# Altium PCB TempBoard.PcbDoc
Units mm, origin at the board's own origin, x right, y up, seen from the top; angles counter-clockwise.
Board outline 127 x 127 mm, 4 copper layers (Top Layer, Ground Plane, 3.3V Plane, Bottom Layer), stack 2.029 mm thick; 156 components, 161 nets, 860 pads, 0 vias.
Unrouted connection lines stored in the file: 533.
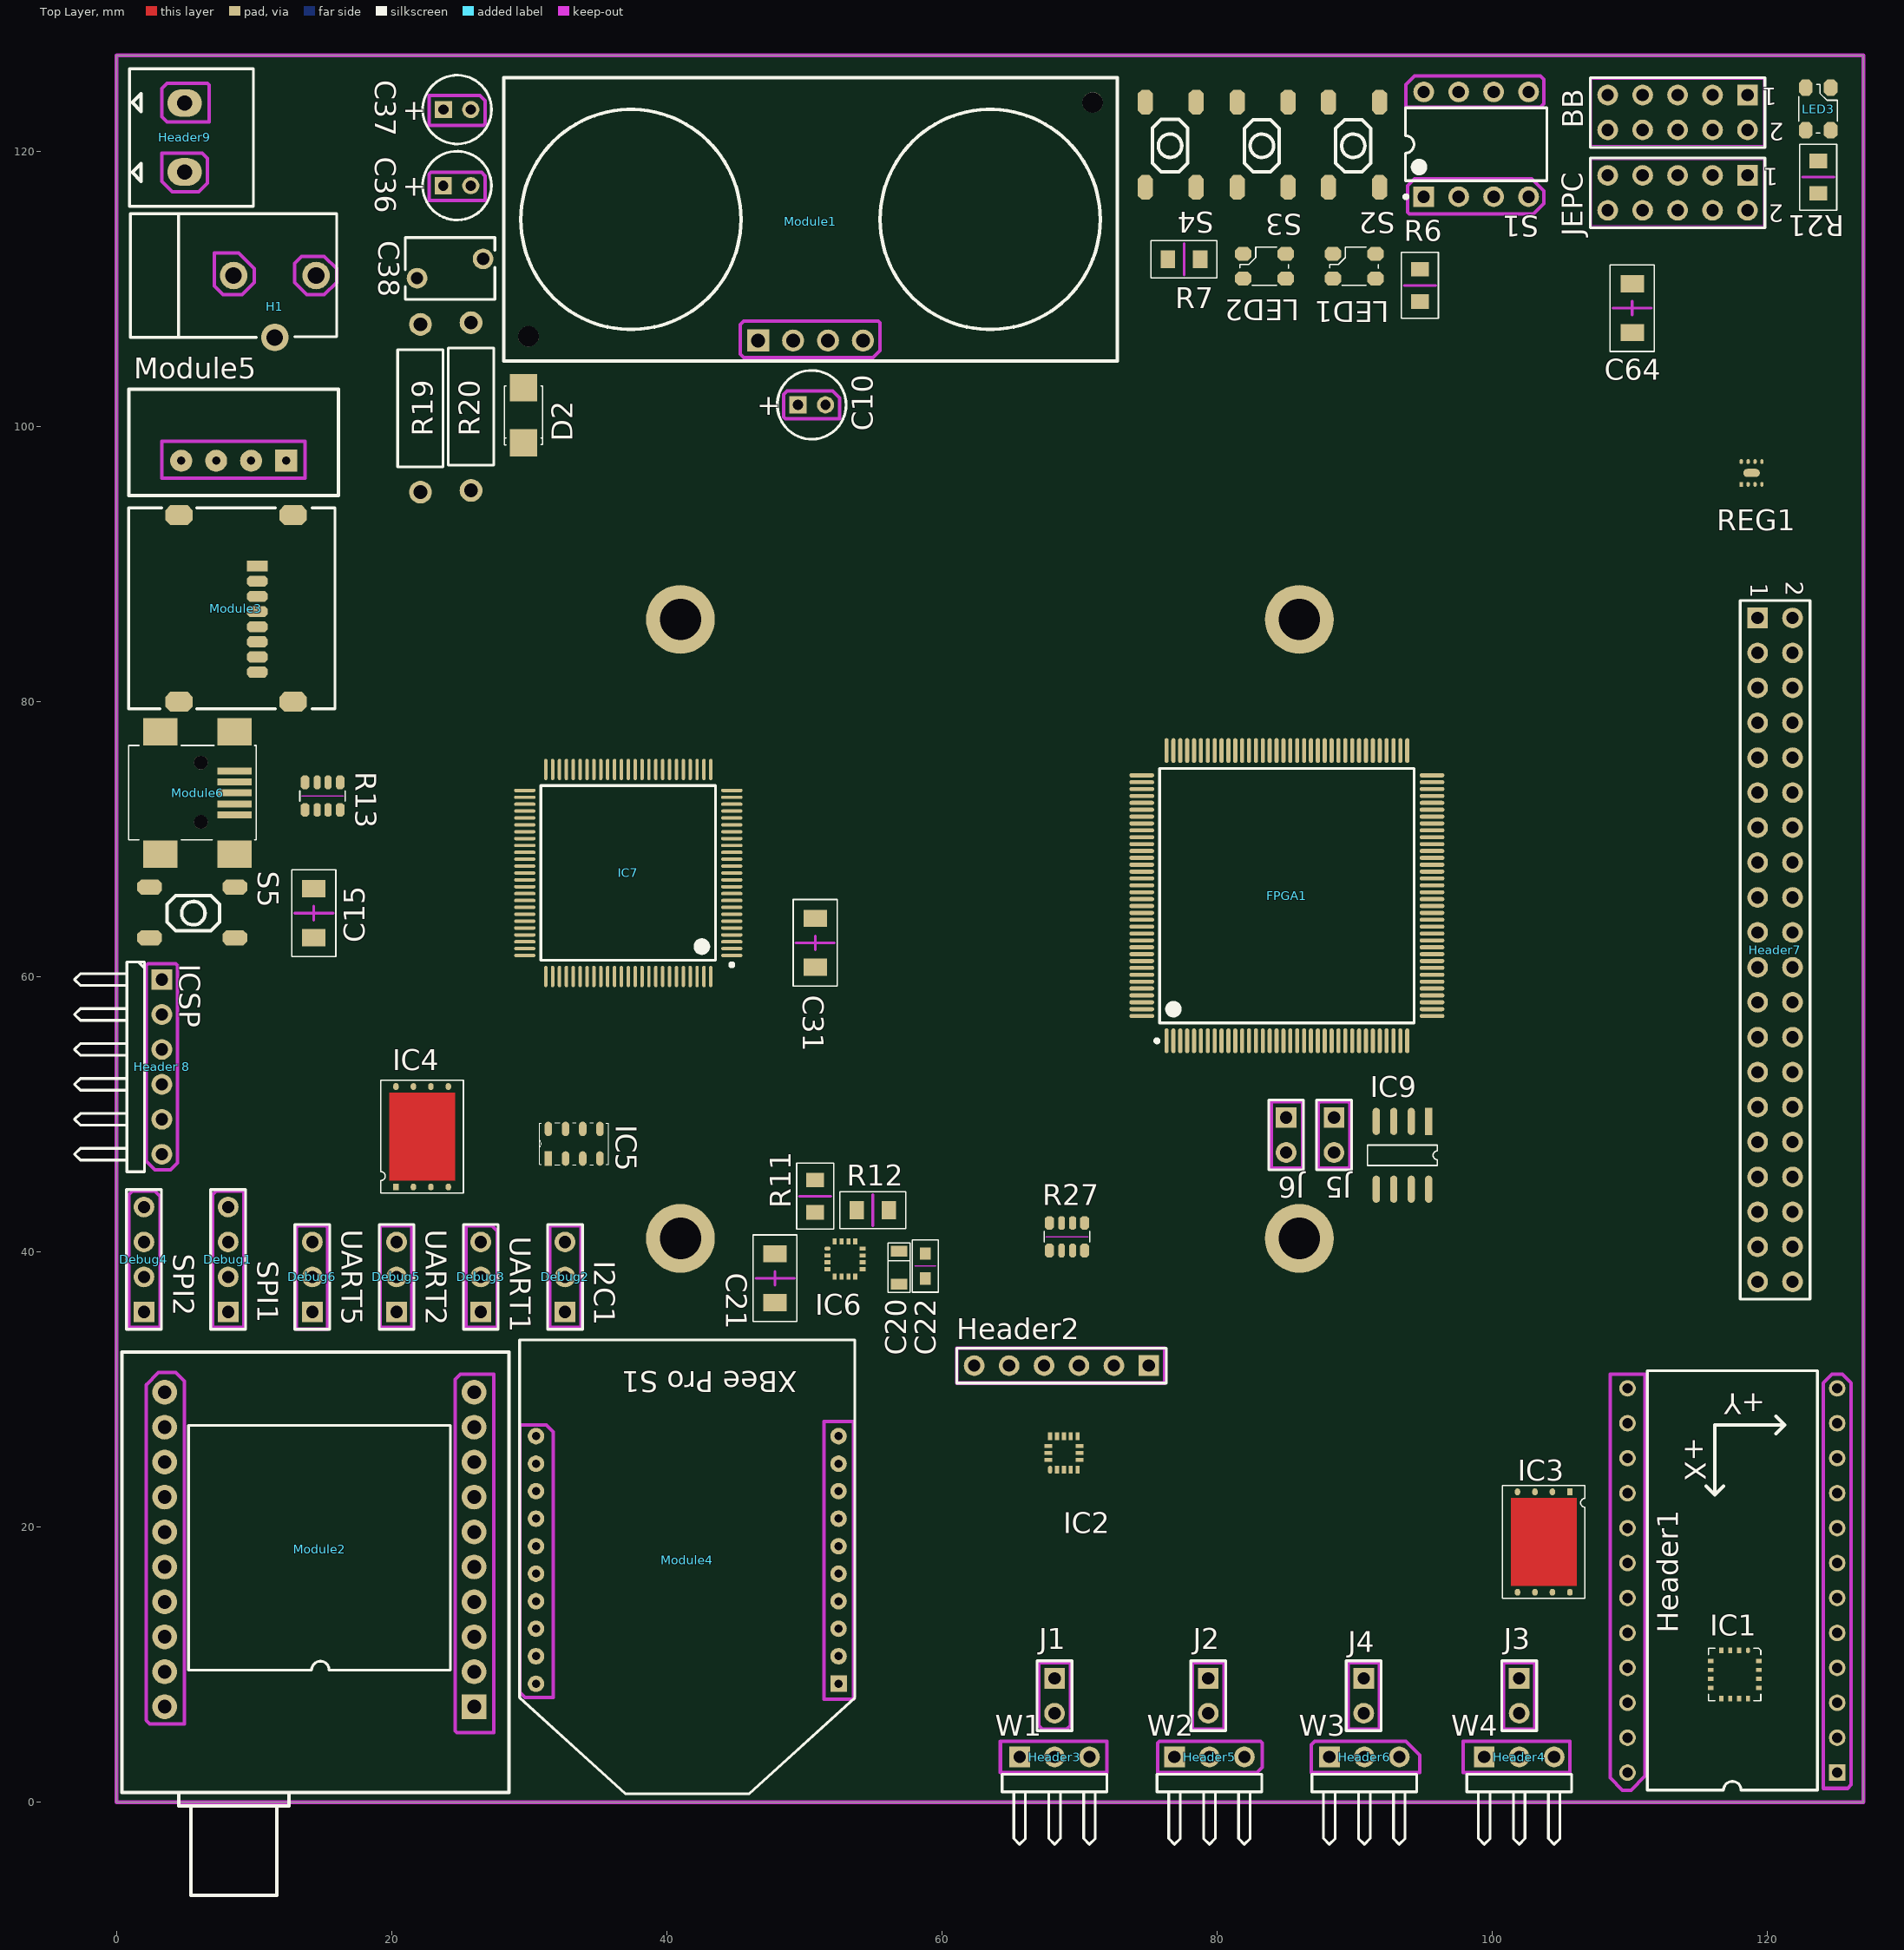
[diagram p0: Top Layer view]
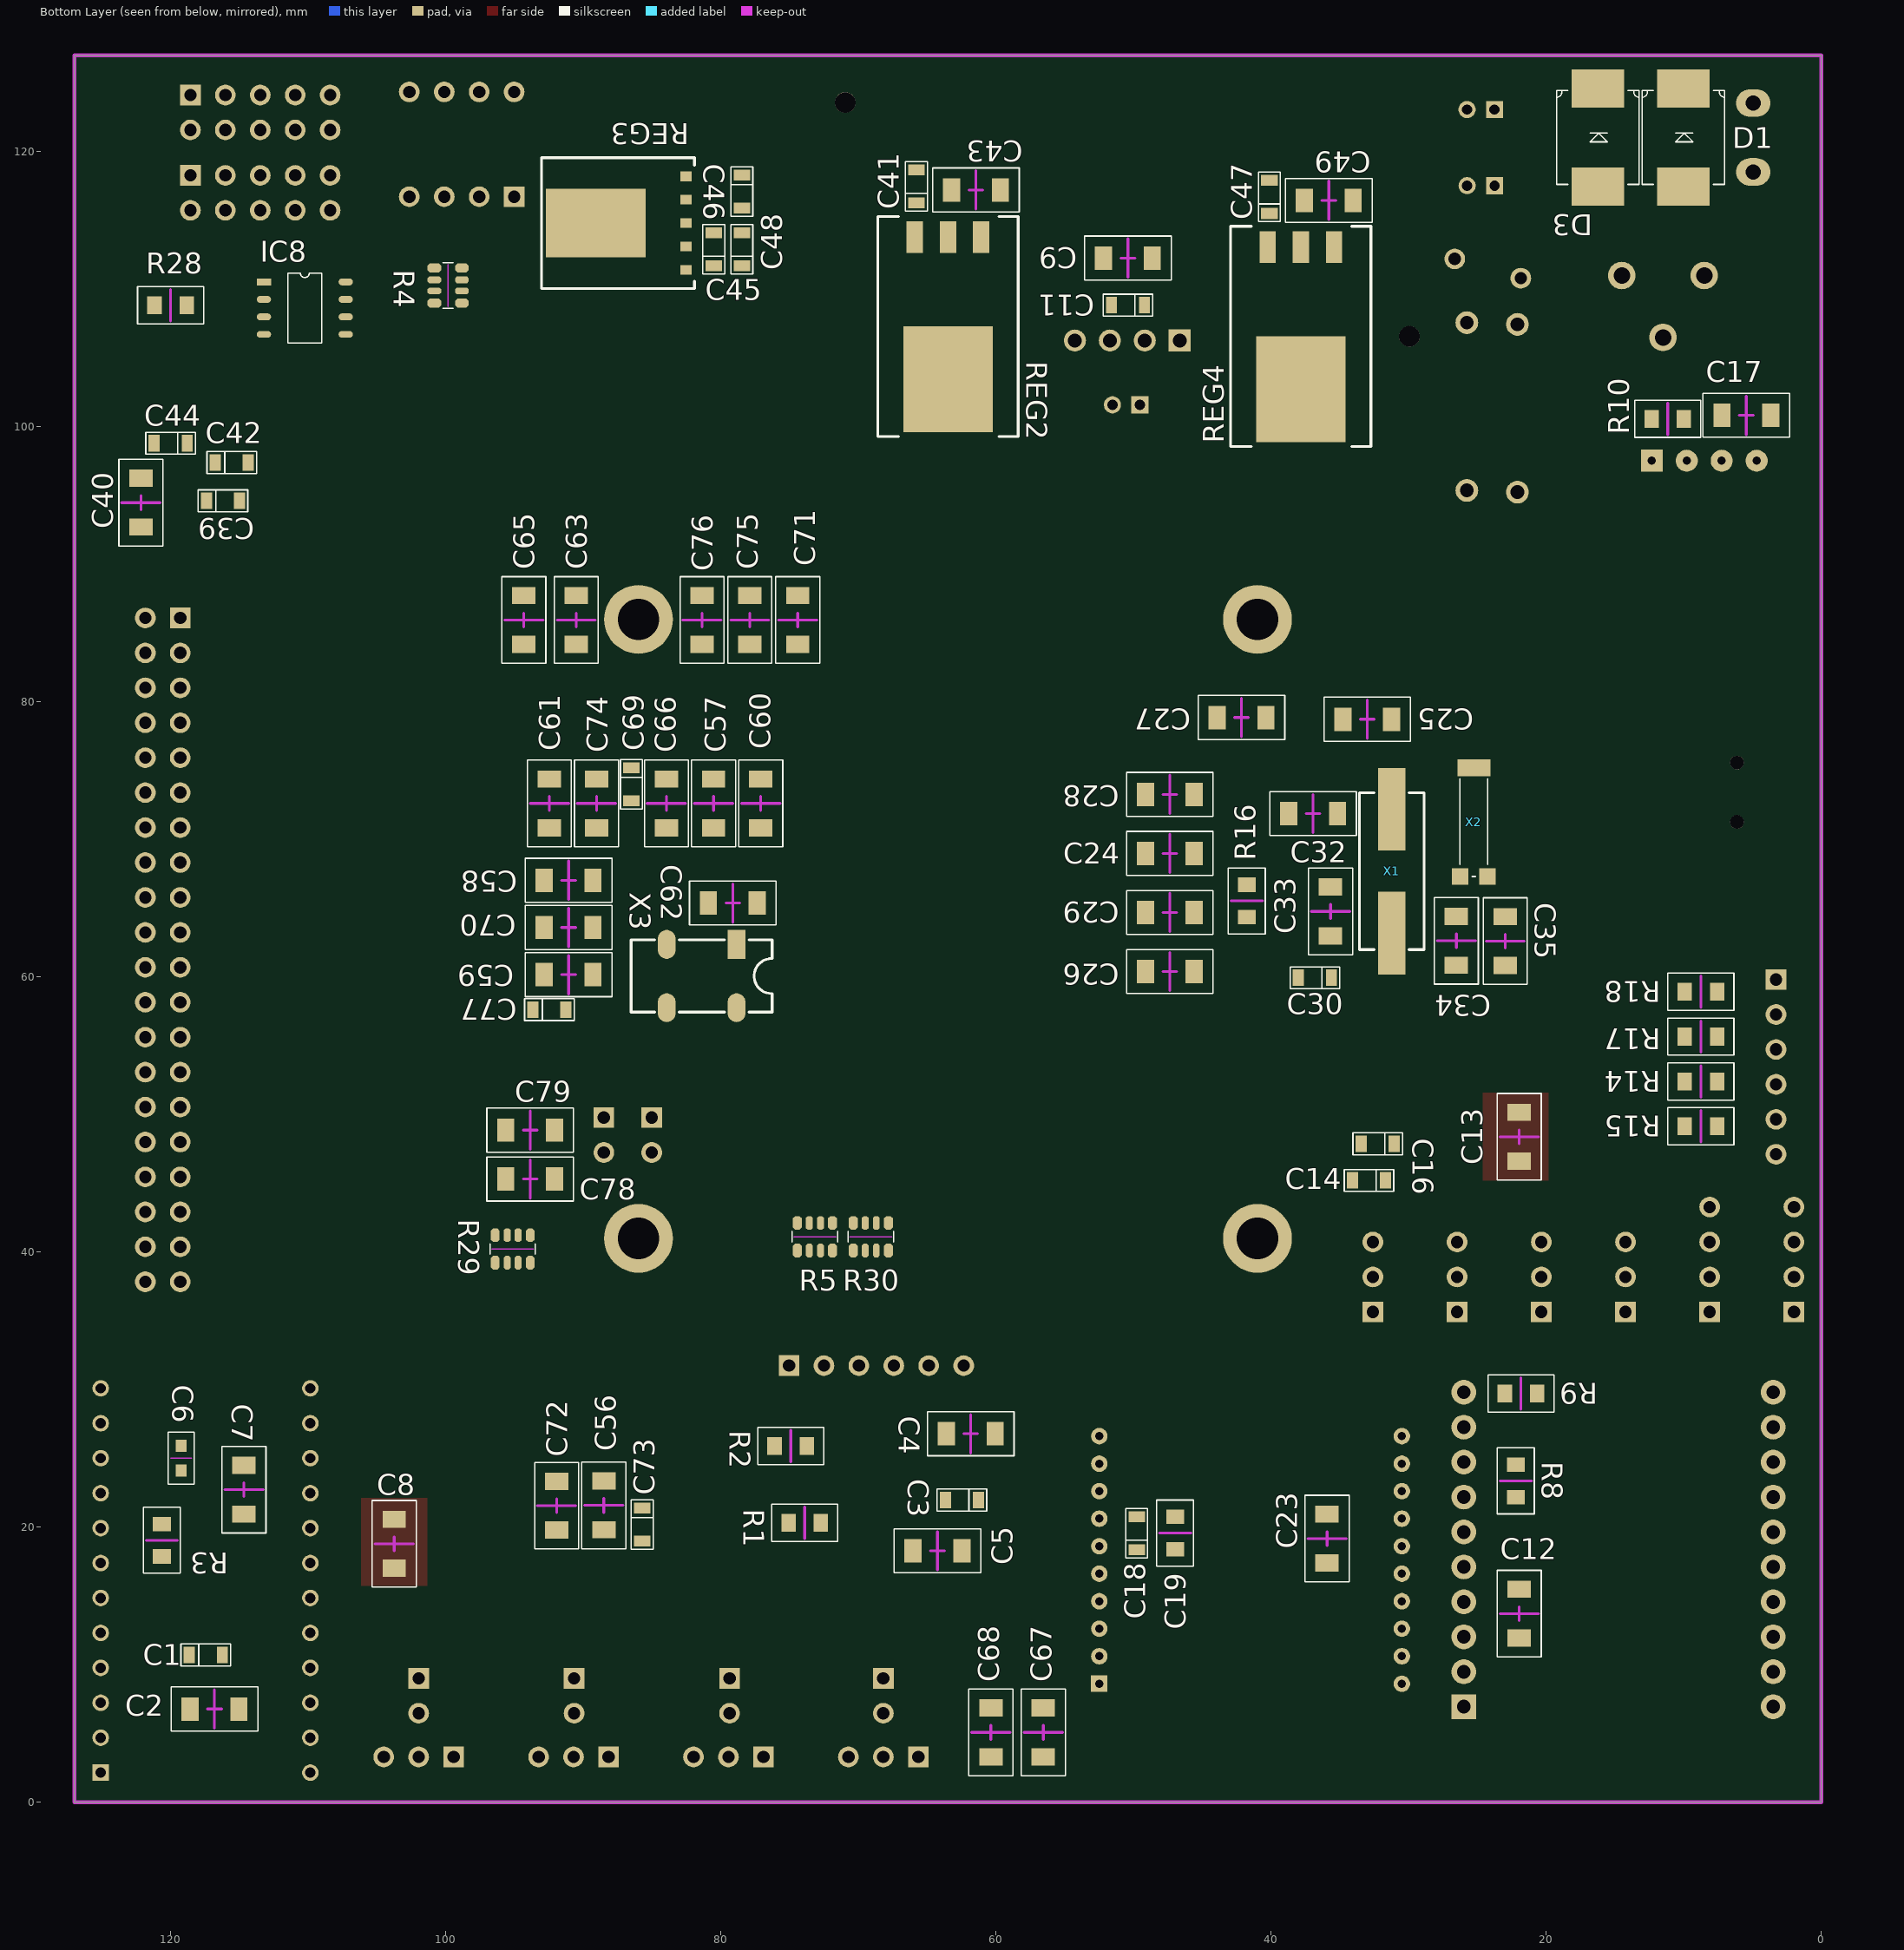
[diagram p1: Bottom Layer view, seen from below]
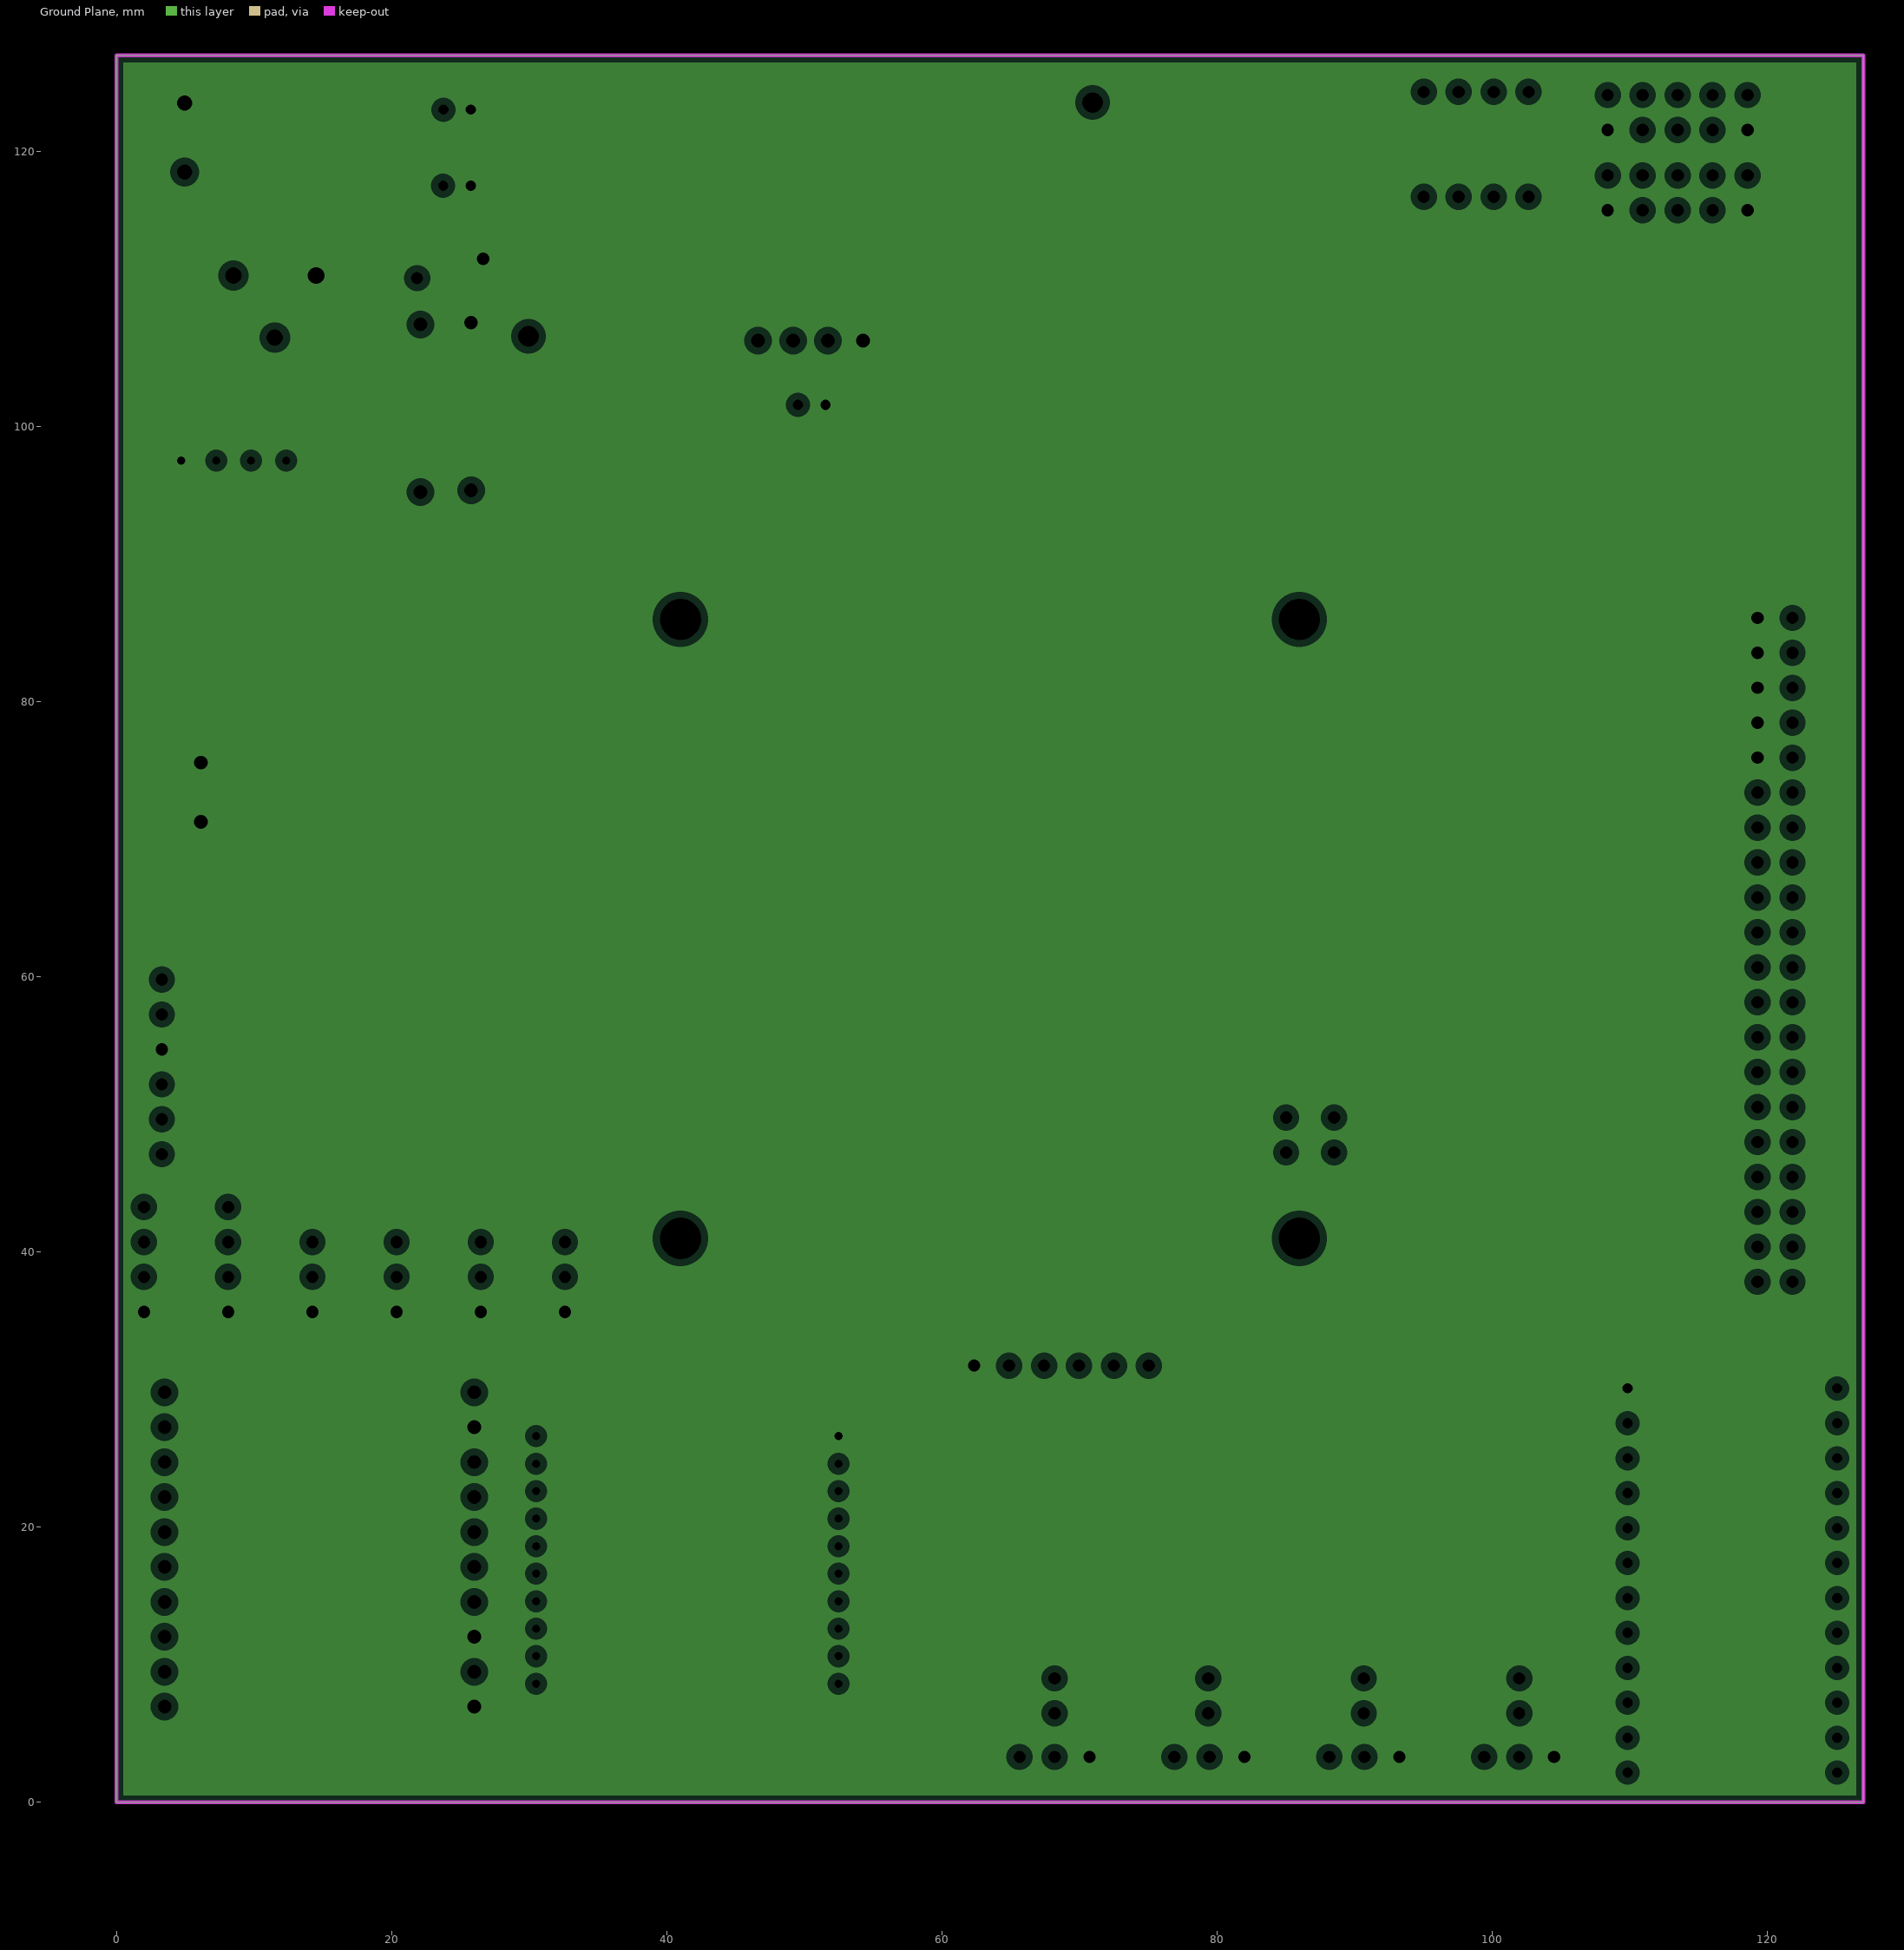
[diagram p2: Ground Plane, clearances drawn from the general rule]
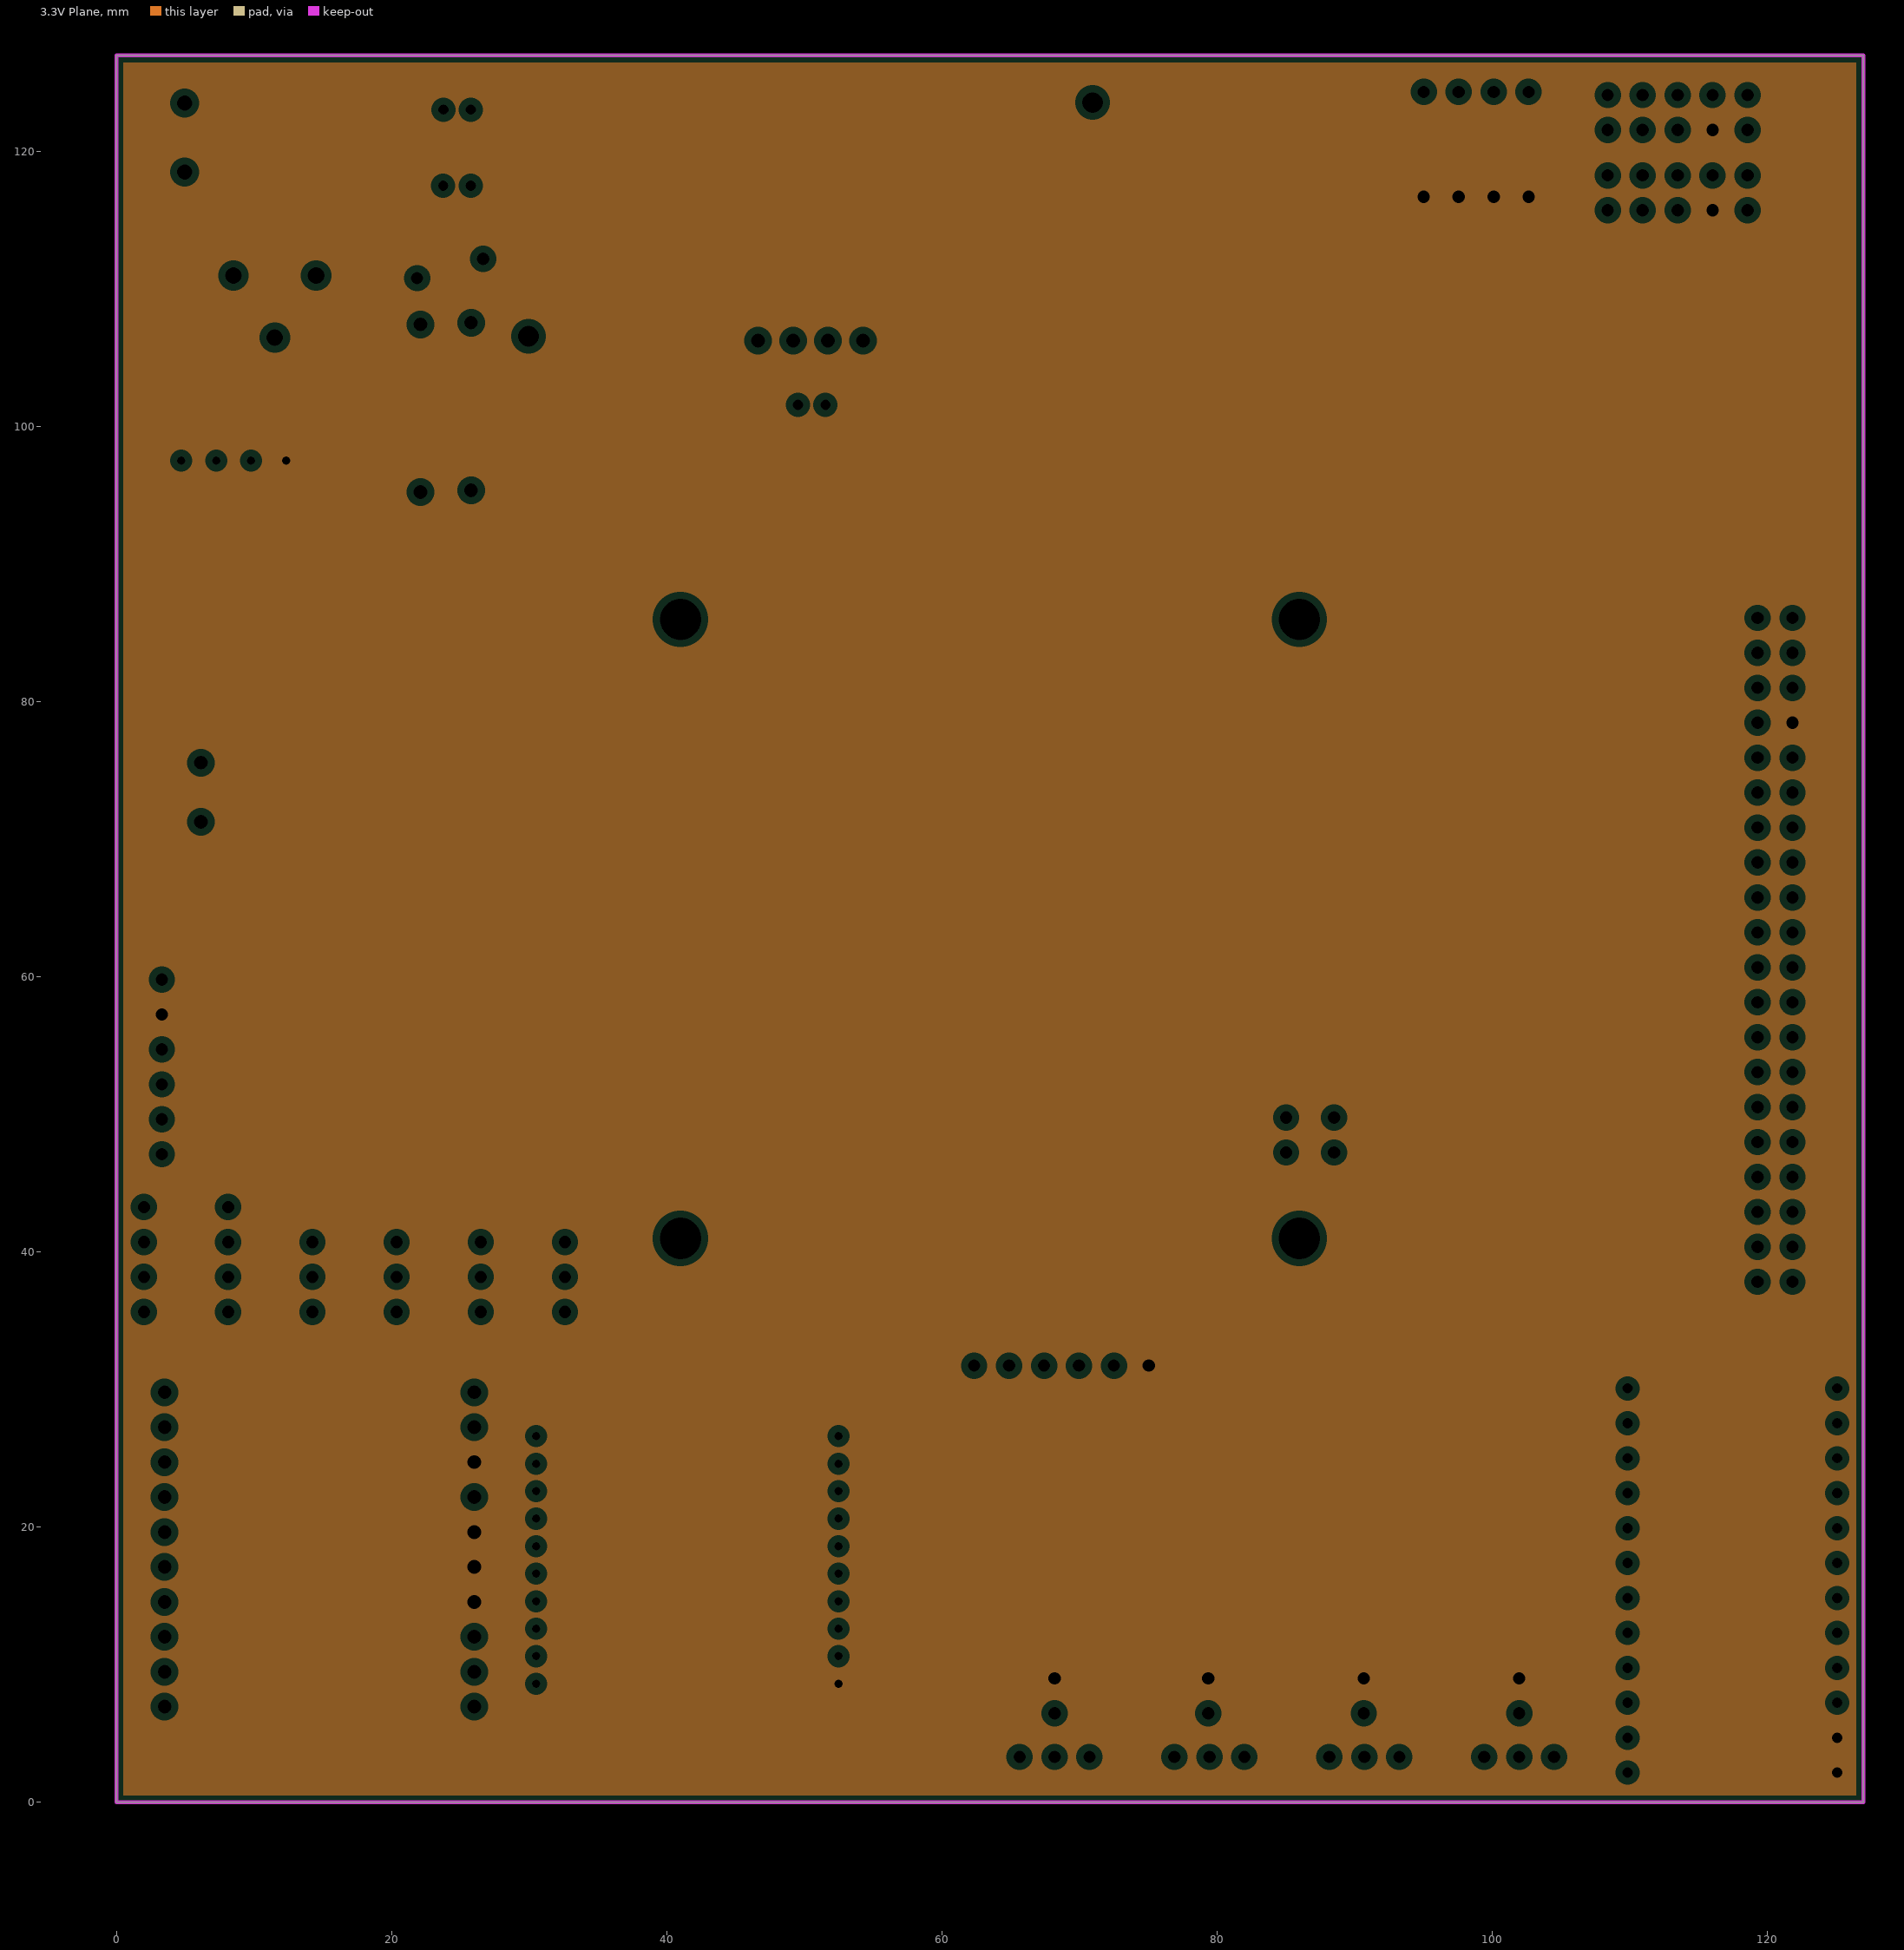
[diagram p3: 3.3V Plane, clearances drawn from the general rule]

## Layer stack, top to bottom
Top Layer: signal copper 0.0356
Dielectric: core 0.62, FR-4, Dk 4.8
Ground Plane: plane copper 0.0356, net GND
Dielectric: prepreg 0.62, FR-4, Dk 4.8
3.3V Plane: plane copper 0.062, net +3.3V
Dielectric: core 0.62, FR-4, Dk 4.8
Bottom Layer: signal copper 0.0356

## Board outline
0,0 127,0 127,127 0,127

## Design rules (kind name [scope] priority, off if disabled: settings)
Clearance Clearance_Pads [IsPad] p1: gap=0.2
Clearance [All] p2: gap=0.254
ComponentClearance [Not All vs Not All] p1: gap=0.153 collisioncheckmode=3 verticalgap=0.254 showdistances=TRUE
DiffPairsRouting [All] p1: maxlimit=0.254 minlimit=0.254 mostfreqgap=0.254 maxuncoupledlength=12.7
Height [All] p1: minheight=0 maxheight=50 prefheight=12.7
HoleSize [All] p1: absolutevalues=TRUE maxlimit=3 minlimit=0.381 maxpercent=80.000 minpercent=20.000
HoleToHoleClearance [All] p1: gap=0.3 allowstackedmicrovias=FALSE
MinimumAnnularRing [All] p1: minimumring=0.089
MinimumSolderMaskSliver [All] p1: minsoldermaskwidth=0.152
PlaneClearance [All] p1: clearance=0.508
PlaneConnect [All] p1: planeconnectstyle=Relief reliefexpansion=0.178 reliefentries=4 reliefconductorwidth=0.381 reliefairgap=0.381
PolygonConnect [All] p1: connectstyle=Relief reliefconductorwidth=0.152 reliefentries=4 polygonreliefangle="45 Angle"
RoutingVias [All] p1: holewidth=0.381 width=0.686 viastyle="Through Hole" minholewidth=0.381 minwidth=0.686 maxholewidth=0.381 maxwidth=0.686
SMDNeckDown [All] p1: percent=63.000
SilkToSilkClearance [All] p1: silktosilkclearance=0.152
SilkscreenOverComponentPads [All] p1: minsilkscreentomaskgap=0.1
SolderMaskExpansion [All] p1: expansion=0
ViasUnderSMD [All] p1: allowed=FALSE
Width Width_Input [(InNet('NetD1_0') OR InNet('NetD3_0') OR InNet('SYS'))] p1: maxlimit=2 minlimit=0.749 preferedwidth=1.37
Width [All] p2: maxlimit=2 minlimit=0.153 preferedwidth=0.254 minimp=50.000000 maximp=50.000000 favimp=50.000000
18 further rules are at their usual default settings.

## Classes and differential pairs
component class FPGA_Clocks: BB C56 C57 C58 C59 C60 C61 C62 C63 C64 C65 C66 C67 C68 C69 C70 C71 C72 C73 C74 C75 C76 C77 C78 C79 IC8 IC9 J5 J6 JEPC R27 R28 R29 R30 X3
component class FPGA_Components: C1 C2 C3 C4 C5 C6 C7 C8 C9 C10 C11 Header2 Header3 Header4 Header5 Header6 IC1 IC2 IC3 J1 J2 J3 J4 LED1 LED2 Module1 R1 R2 R3 R4 R5 R6 R7 S1 S2 S3 S4
component class FPGA_Core: FPGA1 Header7
component class Navigator_Components: C12 C13 C14 C15 C16 C17 C18 C19 C20 C21 C22 IC4 IC5 IC6 Module3 Module5 R8 R9 R10 R11 R12
component class Navigator_Connectors: C23 Debug1 Debug2 Debug3 Debug4 Debug5 Debug6 "Header 8" R13 R14 R15
component class Navigator_Core: C24 C25 C26 C27 C28 C29 C30 C31 C32 C33 C34 C35 IC7 R16 R17 R18 S5 X1 X2
component class Power: C36 C37 C38 C39 C40 C41 C42 C43 C44 C45 C46 C47 C48 C49 D1 D2 D3 H1 Header9 LED3 R19 R20 R21 REG1 REG2 REG3 REG4
component class "Components Class 1": C36 C37 C38 C41 C43 C45 C46 C47 C48 C49 D1 D2 D3 LED3 R19 R20 R21 REG2 REG3 REG4
component class "Components Class 2": C36 C37 C38 C41 C43 C45 C46 C47 C48 C49 D1 D2 D3 H1 Header9 LED3 R19 R20 R21 REG2 REG3 REG4
component class "Components Class 3": C20 C21 C22 IC6 R11 R12
component class "Components Class 4": C39 C40 C42 C44 REG1
component class "Components Class 5": C1 C2 C6 C7 IC1 R3
component class "Components Class 6": C3 C4 C5 Header2 IC2 R1 R2
component class "Components Class 7": C12 R8 R9
component class "Components Class 8": C18 C19 C23
differential pair USB_PIC: +USB_PIC_P -USB_PIC_N

## Components (designator, comment, footprint, x,y, rotation, side; value= is the part's Value field where it differs from the comment)
BB "Header 5X2" HDR2X5 118.575,124.122 r180 top (schematic designator Header13)
C1 "10uF Low-ESR Tantalum CaseA" "Capacitor - Tantalum Case A" 117.46,10.724 r180 bottom
C2 "0.1uF SMD 1206" "SMD 1206" 116.825,6.787 r0 bottom
C3 "4.7uF Low-ESR Tantalum CaseA" "Capacitor - Tantalum Case A" 62.484,21.971 r0 bottom
C4 "0.1uF SMD 1206" "SMD 1206" 61.849,26.797 r0 bottom
C5 "0.1uF SMD 1206" "SMD 1206" 64.262,18.288 r0 bottom
C6 "470nF SMD 0603" "SMD 0603" 119.253,25.019 r270 bottom
C7 "0.1uF SMD 1206" "SMD 1206" 114.681,22.733 r270 bottom
C8 "0.1uF SMD 1206" "SMD 1206" 103.759,18.796 r90 bottom
C9 "0.1uF SMD 1206" "SMD 1206" 50.419,112.268 r180 bottom
C10 "10uF Electrolitic" CAPPR2-5x5 50.546,101.6 r0 top
C11 "1.0uF Low-ESR Tantalum CaseA" "Capacitor - Tantalum Case A" 50.419,108.839 r0 bottom
C12 "0.1uF SMD 1206" "SMD 1206" 21.971,13.716 r270 bottom
C13 "0.1uF SMD 1206" "SMD 1206" 21.971,48.387 r270 bottom
C14 "1.0uF Low-ESR Tantalum CaseA" "Capacitor - Tantalum Case A" 32.893,45.212 r0 bottom
C15 "0.1uF SMD 1206" "SMD 1206" 14.351,64.643 r270 top
C16 "1.0uF Low-ESR Tantalum CaseA" "Capacitor - Tantalum Case A" 32.258,47.879 r0 bottom
C17 "0.1uF SMD 1206" "SMD 1206" 5.461,100.838 r180 bottom
C18 "1.0uF Low-ESR Tantalum CaseA" "Capacitor - Tantalum Case A" 49.784,19.558 r90 bottom
C19 "8.2pF SMD 0805" "SMD 0805" 46.99,19.579 r270 bottom
C20 "4.7uF Low-ESR Tantalum CaseA" "Capacitor - Tantalum Case A" 56.896,38.862 r270 top
C21 "0.1uF SMD 1206" "SMD 1206" 47.879,38.1 r270 top
C22 "220nF SMD 0603" "SMD 0603" 58.801,38.989 r270 top
C23 "0.1uF SMD 1206" "SMD 1206" 35.941,19.177 r270 bottom
C24 "0.1uF SMD 1206" "SMD 1206" 47.371,68.986 r0 bottom
C25 "0.1uF SMD 1206" "SMD 1206" 33.02,78.74 r180 bottom
C26 "0.1uF SMD 1206" "SMD 1206" 47.371,60.401 r0 bottom
C27 "0.1uF SMD 1206" "SMD 1206" 42.164,78.867 r0 bottom
C28 "0.1uF SMD 1206" "SMD 1206" 47.371,73.279 r0 bottom
C29 "0.1uF SMD 1206" "SMD 1206" 47.371,64.694 r0 bottom
C30 "10uF Low-ESR Tantalum CaseA" "Capacitor - Tantalum Case A" 36.83,59.944 r0 bottom
C31 "0.1uF SMD 1206" "SMD 1206" 50.8,62.484 r270 top
C32 "22pF SMD 1206" "SMD 1206" 35.687,64.77 r270 bottom
C33 "22pF SMD 1206" "SMD 1206" 36.957,71.882 r180 bottom
C34 "22pF SMD 1206" "SMD 1206" 26.541,62.635 r90 bottom
C35 "22pF SMD 1206" "SMD 1206" 22.987,62.611 r90 bottom
C36 "1.0uF Electrolitic" CAPPR2-5x5 24.758,117.533 r0 top
C37 "10uF Electrolitic" CAPPR2-5x5 24.765,123.063 r0 top
C38 "0.1uF Ceramic" CAPRD5-6.5x4.5 24.257,111.506 r180 top
C39 "1.0uF Low-ESR Tantalum CaseA" "Capacitor - Tantalum Case A" 116.205,94.615 r180 bottom
C40 "0.1uF SMD 1206" "SMD 1206" 122.174,94.488 r270 bottom
C41 "10uF Low-ESR Tantalum CaseA" "Capacitor - Tantalum Case A" 65.786,117.475 r90 bottom
C42 "1.0uF Low-ESR Tantalum CaseA" "Capacitor - Tantalum Case A" 115.57,97.409 r180 bottom
C43 "0.1uF SMD 1206" "SMD 1206" 61.468,117.221 r0 bottom
C44 "1.0uF Low-ESR Tantalum CaseA" "Capacitor - Tantalum Case A" 120.015,98.806 r0 bottom
C45 "1.0uF Low-ESR Tantalum CaseA" "Capacitor - Tantalum Case A" 80.518,112.903 r90 bottom
C46 "10uF Low-ESR Tantalum CaseA" "Capacitor - Tantalum Case A" 78.486,117.094 r270 bottom
C47 "10uF Low-ESR Tantalum CaseA" "Capacitor - Tantalum Case A" 40.132,116.713 r90 bottom
C48 "1.0uF Low-ESR Tantalum CaseA" "Capacitor - Tantalum Case A" 78.486,112.903 r90 bottom
C49 "0.1uF SMD 1206" "SMD 1206" 35.814,116.459 r180 bottom
C56 "0.1uF SMD 1206" "SMD 1206" 88.519,21.59 r270 bottom
C57 "0.1uF SMD 1206" "SMD 1206" 80.541,72.619 r270 bottom
C58 "0.1uF SMD 1206" "SMD 1206" 91.082,67.031 r180 bottom
C59 "0.1uF SMD 1206" "SMD 1206" 91.082,60.173 r180 bottom
C60 "0.1uF SMD 1206" "SMD 1206" 77.112,72.619 r270 bottom
C61 "0.1uF SMD 1206" "SMD 1206" 92.479,72.619 r270 bottom
C62 "0.1uF SMD 1206" "SMD 1206" 79.144,65.38 r0 bottom
C63 "0.1uF SMD 1206" "SMD 1206" 90.526,85.956 r90 bottom
C64 "0.1uF SMD 1206" "SMD 1206" 110.193,108.628 r270 top
C65 "0.1uF SMD 1206" "SMD 1206" 94.336,85.956 r90 bottom
C66 "0.1uF SMD 1206" "SMD 1206" 83.97,72.619 r270 bottom
C67 "0.1uF SMD 1206" "SMD 1206" 56.569,5.085 r90 bottom
C68 "0.1uF SMD 1206" "SMD 1206" 60.38,5.085 r90 bottom
C69 "1.0uF Low-ESR Tantalum CaseA" "Capacitor - Tantalum Case A" 86.51,74.016 r270 bottom
C70 "0.1uF SMD 1206" "SMD 1206" 91.082,63.602 r180 bottom
C71 "0.1uF SMD 1206" "SMD 1206" 74.422,85.956 r90 bottom
C72 "0.1uF SMD 1206" "SMD 1206" 91.948,21.567 r90 bottom
C73 "1.0uF Low-ESR Tantalum CaseA" "Capacitor - Tantalum Case A" 85.725,20.193 r270 bottom
C74 "0.1uF SMD 1206" "SMD 1206" 89.05,72.619 r270 bottom
C75 "0.1uF SMD 1206" "SMD 1206" 77.907,85.956 r90 bottom
C76 "0.1uF SMD 1206" "SMD 1206" 81.382,85.956 r90 bottom
C77 "1.0uF Low-ESR Tantalum CaseA" "Capacitor - Tantalum Case A" 92.479,57.633 r180 bottom
C78 "0.1uF SMD 1206" "SMD 1206" 93.876,45.314 r0 bottom
C79 "10nF SMD 1206" "SMD 1206" 93.876,48.87 r0 bottom
D1 "MBRS540T3G" MBRS540T3G 10.033,121.031 r270 bottom
D2 "1SMAS913BT3G" 1SMA5913BT3G 29.591,100.838 r90 top
D3 "MBRS540T3G" MBRS540T3G 16.256,121.031 r270 bottom
Debug1 "SPI1" HDR1X4 8.123,35.657 r90 top
Debug2 "I2C1" HDR1X3 32.609,35.657 r90 top
Debug3 "UART1" HDR1X3 26.488,35.657 r90 top
Debug4 "SPI2" HDR1X4 2.002,35.657 r90 top
Debug5 "UART2" HDR1X3 20.366,35.657 r90 top
Debug6 "UART5" HDR1X3 14.245,35.657 r90 top
FPGA1 "EP2C8T144C8N" TQFP144_N 85.09,65.913 r90 top
H1 "DC Jack" "DC Power Jack" 1.016,110.998 r180 top
Header1 "L3G4200D Header" DIP24 125.095,2.159 r180 top
Header2 "Header 6" HDR1X6 75.057,31.75 r180 top
Header3 "W1" HDR1X3H 65.659,3.302 r0 top
Header4 "W4" HDR1X3H 99.441,3.302 r0 top
Header5 "W2" HDR1X3H 76.92,3.302 r0 top
Header6 "W3" HDR1X3H 88.18,3.302 r0 top
Header7 "Header 20X2H" HDR2X20 119.311,86.106 r270 top
Header9 "Battery Conn" "PC Wire Connector" 4.953,121.031 r90 top
"Header 8" "ICSP" HDR1X6H 3.302,59.817 r270 top (schematic designator Header8)
IC1 "L3G4200D" L3G4200DTR 118.618,11.049 r270 top
IC2 "MMA8452Q" MMA8452QT 68.875,25.4 r90 top
IC3 "S25FL128P" S25FL128P 103.759,18.923 r270 top
IC4 "S25FL128P" S25FL128P 22.225,48.387 r90 top
IC5 "MPL115A1" MPL115A1 33.274,47.879 r90 top
IC6 "HMC5883L" HMC5883L-TR 51.689,40.259 r0 top
IC7 "PIC32MX795F512L-80I/PT" TQFP-PF100_L 37.211,67.564 r180 top
IC8 "EPCS16SI8N" "EPCS16SI8N SO-8" 112.733,110.533 r180 bottom
IC9 "DS1085" "DS1085 SO-150mil" 95.4,49.505 r270 top
J1 "Jumper" HDR1X2 68.199,9.017 r270 top
J2 "Jumper" HDR1X2 79.375,9.017 r270 top
J3 "Jumper" HDR1X2 101.981,9.017 r270 top
J4 "Jumper" HDR1X2 90.678,9.017 r270 top
J5 "Jumper" HDR1X2 88.519,49.784 r270 top
J6 "Jumper" HDR1X2 85.036,49.784 r270 top
JEPC "Header 5X2" HDR2X5 118.575,118.28 r180 top (schematic designator Header12)
LED1 "LED PLCC-4" "PLCC-4 LED" 89.978,111.676 r0 top
LED2 "LED PLCC-4" "PLCC-4 LED" 83.461,111.676 r0 top
LED3 "LED PLCC-4" "PLCC-4 LED" 123.713,123.106 r270 top
Module1 "HC-SR04 Ultrasonic Module" "HC-SR04 Ultrasonic Ranger" 72.771,104.775 r180 top
Module2 "Copernicus II DIP Module" "Copernicus GPS Module" 28.545,0.732 r180 top
Module3 "MicroSD Socket" "MicroSD Card Slot" 0.889,80.01 r90 top
Module4 "XBee Pro S1" "XBee Pro S1 Wireless Module" 41.499,17.623 r180 top
Module5 "RHT03" "RHT03 Humidity Sensor" 16.129,94.996 r180 top
Module6 "Mini-USB" "Mini B USB Connector" 0.889,76.835 r270 top
R1 "4.7K SMD 0805" "SMD 0805" 73.914,20.32 r0 bottom
R2 "4.7K SMD 0805" "SMD 0805" 74.93,25.908 r180 bottom
R3 "10K SMD 0805" "SMD 0805" 120.65,19.05 r270 bottom
R4 "Value: 10K SMD Resistor Array" "Resistor Array YC164" 99.837,110.279 r0 bottom
R5 "Value: 10K SMD Resistor Array" "Resistor Array YC164" 73.175,41.123 r270 bottom
R6 "1K SMD 0805" "SMD 0805" 94.757,110.279 r270 top
R7 "1K SMD 0805" "SMD 0805" 77.612,112.184 r180 top
R8 "10K SMD 0805" "SMD 0805" 22.225,23.368 r270 bottom
R9 "10K SMD 0805" "SMD 0805" 21.844,29.718 r0 bottom
R10 "1K SMD 0805" "SMD 0805" 11.176,100.584 r0 bottom
R11 "2.2K SMD 0805" "SMD 0805" 50.8,44.069 r90 top
R12 "2.2K SMD 0805" "SMD 0805" 54.991,43.053 r0 top
R13 "Value: 10K SMD Resistor Array" "Resistor Array YC164" 14.986,73.152 r270 top
R14 "100 SMD 0805" "SMD 0805" 8.763,52.409 r0 bottom
R15 "100 SMD 0805" "SMD 0805" 8.763,49.149 r0 bottom
R16 "10 SMD 0805" "SMD 0805" 41.783,65.532 r90 bottom
R17 "10K SMD 0805" "SMD 0805" 8.763,55.668 r180 bottom
R18 "100 SMD 0805" "SMD 0805" 8.763,58.928 r180 bottom
R19 "3.9K Radial" RES12.2-8.5X3.3 22.098,101.346 r90 top
R20 "1.3K Radial" RES12.2-8.5X3.3 25.781,101.473 r270 top
R21 "1K SMD 0805" "SMD 0805" 123.713,118.153 r270 top
R27 "Value: 10K SMD Resistor Array" "Resistor Array YC164" 69.111,41.123 r270 top
R28 "10K SMD 0805" "SMD 0805" 120.015,108.839 r180 bottom
R29 "Value: 10K SMD Resistor Array" "Resistor Array YC164" 95.146,40.234 r90 bottom
R30 "Value: 10K SMD Resistor Array" "Resistor Array YC164" 69.111,41.123 r270 bottom
REG1 "MIC5330-MFYML" "MIC5330-MFYML TR" 118.872,96.647 r90 top
REG2 "MIC29300-5.0WU" "TO-263 D2PACK" 63.5,113.792 r270 bottom
REG3 "MIC49300-1.2WR" "MIC49300-1.2WR SPACK-5" 82.55,114.808 r0 bottom
REG4 "MIC29300-3.3WU" "TO-263 D2PACK" 37.846,113.076 r270 bottom
S1 "SW-DIP4" DIP-8 98.851,120.536 r90 top
S2 "SMD Tactile Switch" "SMD Tactile Switch" 91.819,123.603 r270 top
S3 "SMD Tactile Switch" "SMD Tactile Switch" 85.175,123.603 r270 top
S4 "SMD Tactile Switch" "SMD Tactile Switch" 78.501,123.614 r270 top
S5 "SMD Tactile Switch" "SMD Tactile Switch" 2.413,66.548 r0 top
X1 "XT9M20ANA8M" "XT9M20ANA8M - 8MHz Capacitor" 31.242,67.691 r270 bottom
X2 "SSP-T6-7PF-20PPM" "32.768KHz Crystal" 25.273,67.31 r180 bottom
X3 "SE2838CT-ND" "SG-636PCE 25.175MHz Crystal" 81.407,60.071 r270 bottom

## Footprints (in the part's own frame and the unit in brackets; to place one, negate y for a bottom-side part, rotate by r counter-clockwise, add the part's x,y. Pads: shape width x height; smd on the part's side, far side on the other; paste and mask are expansions set on the pad)
1SMA5913BT3G [mm]
  rect 2x2 smd: A(2,0) K(-2,0)
  silkscreen extent -2.16,-1.4 2.13,1.4
"32.768KHz Crystal" [mm]
  rect 1.2x1.2 smd: 1(-1,0) 2(1,0)
  rect 2.4x1.2 smd: NC(0,7.9)
  silkscreen extent -1,0 1,7.11
"Capacitor - Tantalum Case A" [mm]
  rect 0.8x1.2 smd: 1(-1.2,0) 2(1.2,0)
  silkscreen extent -1.8,-0.8 1.8,0.8
CAPPR2-5x5 [mm] "Capacitor, Electrolytic, Radial; Body 5 x 5 mm (Dia.xH typ); Pin Spacing 2 mm (typ)"
  rect 1.25x1.25 hole 0.75: 1(-1,0)
  round 1.25 hole 0.75: 2(1,0)
  silkscreen extent -2.5,-2.5 2.5,2.5
CAPRD5-6.5x4.5 [mm] "Capacitor, Ceramic, Thru-Hole, Disc; Body 6.5 x 4.5 mm (LxW max) Pin Spacing 5 mm (typ)"
  round 1.5 hole 0.9: 1(-2.4,-0.7) 2(2.4,0.7)
  silkscreen extent -3.25,-2.25 3.25,2.25
"Copernicus GPS Module" [mm]
  rect 1.8x1.8 hole 1: 1(2.54,-6.223)
  round 1.8 hole 1: 2(2.54,-8.763) 3(2.54,-11.303) 4(2.54,-13.843) 5(2.54,-16.383) 6(2.54,-18.923) 7(2.54,-21.463) 8(2.54,-24.003) 9(2.54,-26.543) 10(2.54,-29.083) 11(25.04,-29.083) 12(25.04,-26.543) 13(25.04,-24.003) 14(25.04,-21.463) 15(25.04,-18.923) 16(25.04,-16.383) 17(25.04,-13.843) 18(25.04,-11.303) 19(25.04,-8.763) 20(25.04,-6.223)
  silkscreen extent 0,-32 28.15,7.5
"DC Power Jack" [mm]
  round 2 hole 1.2: IN(-7.5,0) NC(-10.5,4.5) OUT(-13.5,0)
  silkscreen extent -15,-4.5 0,4.5
DIP24 [mm]
  rect 1.2x1.2 hole 0.75: 1(0,0)
  round 1.2 hole 0.75: 2(0,-2.54) 3(0,-5.08) 4(0,-7.62) 5(0,-10.16) 6(0,-12.7) 7(0,-15.24) 8(0,-17.78) 9(0,-20.32) 10(0,-22.86) 11(0,-25.4) 12(0,-27.94) 13(15.24,-27.94) 14(15.24,-25.4) 15(15.24,-22.86) 16(15.24,-20.32) 17(15.24,-17.78) 18(15.24,-15.24) 19(15.24,-12.7) 20(15.24,-10.16) 21(15.24,-7.62) 22(15.24,-5.08) 23(15.24,-2.54) 24(15.24,0)
  silkscreen extent 1.43,-29.21 13.8,1.27
DIP-8 [mm] "DIP; 8 Leads; Row Spacing 7.62 mm; Pitch 2.54 mm"
  rect 1.5x1.5 hole 0.9: 1(-3.81,3.81)
  round 1.5 hole 0.9: 2(-3.81,1.27) 3(-3.81,-1.27) 4(-3.81,-3.81) 5(3.81,-3.81) 6(3.81,-1.27) 7(3.81,1.27) 8(3.81,3.81)
  silkscreen extent -3.93,-5.15 2.65,5.23, body extent -3.6,-5.15 3.6,5.15, height 5.08
"DS1085 SO-150mil" [mm]
  rect 1.98x0.53 smd: 1(0,0)
  oval 1.98x0.53 smd: 2(0,-1.27) 3(0,-2.54) 4(0,-3.81) 5(4.93,-3.81) 6(4.93,-2.54) 7(4.93,-1.27) 8(4.93,0)
  silkscreen extent 1.72,-4.44 3.2,0.64
"EPCS16SI8N SO-8" [mm]
  rect 1.04x0.5 smd: 1(-0.5,0)
  oval 1.04x0.5 smd: 2(-0.5,-1.27) 3(-0.5,-2.54) 4(-0.5,-3.81) 5(5.45,-3.81) 6(5.45,-2.54) 7(5.45,-1.27) 8(5.45,0)
  silkscreen extent 1.25,-4.44 3.7,0.64
"HC-SR04 Ultrasonic Ranger" [mm]
  rect 1.6x1.6 hole 1: 1(26.12,-1.5)
  round 1.6 hole 1: 2(23.58,-1.5) 3(21.04,-1.5) 4(18.5,-1.5)
  round 1.5 hole 1.5: NC(1.8,-18.8) NC(42.82,-1.8)
  silkscreen extent 0,-20.6 44.62,0
HDR1X2 [mm] "Connector; Header; 2 Position"
  rect 1.5x1.5 hole 0.9: 1(0,0)
  round 1.5 hole 0.9: 2(2.54,0)
  silkscreen extent -1.27,-1.27 3.81,1.27
HDR1X3 [mm] "Connector; Header; 3 Position"
  rect 1.5x1.5 hole 0.9: 1(0,0)
  round 1.5 hole 0.9: 2(2.54,0) 3(5.08,0)
  silkscreen extent -1.27,-1.27 6.35,1.27
HDR1X3H [mm] "Connector; Header; 3 Position; Right Angle"
  rect 1.5x1.5 hole 0.9: 1(0,0)
  round 1.5 hole 0.9: 2(2.54,0) 3(5.08,0)
  silkscreen extent -1.27,-6.35 6.35,-1.27
HDR1X4 [mm] "Connector; Header; 4 Position"
  rect 1.5x1.5 hole 0.9: 1(0,0)
  round 1.5 hole 0.9: 2(2.54,0) 3(5.08,0) 4(7.62,0)
  silkscreen extent -1.27,-1.27 8.89,1.27
HDR1X6 [mm] "Connector; Header; 6 Position"
  rect 1.5x1.5 hole 0.9: 1(0,0)
  round 1.5 hole 0.9: 2(2.54,0) 3(5.08,0) 4(7.62,0) 5(10.16,0) 6(12.7,0)
  silkscreen extent -1.27,-1.27 13.97,1.27
HDR1X6H [mm] "Connector; Header; 6 Position; Right Angle"
  rect 1.5x1.5 hole 0.9: 1(0,0)
  round 1.5 hole 0.9: 2(2.54,0) 3(5.08,0) 4(7.62,0) 5(10.16,0) 6(12.7,0)
  silkscreen extent -1.27,-6.35 13.97,-1.27
HDR2X5 [mm] "Connector; Header; 5x2 Position"
  rect 1.5x1.5 hole 0.9: 1(0,0)
  round 1.5 hole 0.9: 2(0,2.54) 3(2.54,0) 4(2.54,2.54) 5(5.08,0) 6(5.08,2.54) 7(7.62,0) 8(7.62,2.54) 9(10.16,0) 10(10.16,2.54)
  silkscreen extent -1.27,-1.27 11.43,3.81
HDR2X20 [mm] "Connector; Header; 20x2 Position"
  rect 1.5x1.5 hole 0.9: 1(0,0)
  round 1.5 hole 0.9: 2(0,2.54) 3(2.54,0) 4(2.54,2.54) 5(5.08,0) 6(5.08,2.54) 7(7.62,0) 8(7.62,2.54) 9(10.16,0) 10(10.16,2.54) 11(12.7,0) 12(12.7,2.54) 13(15.24,0) 14(15.24,2.54) 15(17.78,0) 16(17.78,2.54) 17(20.32,0) 18(20.32,2.54) 19(22.86,0) 20(22.86,2.54) 21(25.4,0) 22(25.4,2.54) 23(27.94,0) 24(27.94,2.54) 25(30.48,0) 26(30.48,2.54) 27(33.02,0) 28(33.02,2.54) 29(35.56,0) 30(35.56,2.54) 31(38.1,0) 32(38.1,2.54) 33(40.64,0) 34(40.64,2.54) 35(43.18,0) 36(43.18,2.54) 37(45.72,0) 38(45.72,2.54) 39(48.26,0) 40(48.26,2.54)
  silkscreen extent -1.27,-1.27 49.53,3.81
HMC5883L-TR [mm]
  oval 0.45x0.3 smd: 1(0,0)
  rect 0.45x0.3 smd: 2(0,-0.5) 3(0,-1) 4(0,-1.5) 9(2.55,-1.5) 10(2.55,-1) 11(2.55,-0.5) 12(2.55,0)
  rect 0.3x0.45 smd: 5(0.525,-2.025) 6(1.025,-2.025) 7(1.525,-2.025) 8(2.025,-2.025) 13(2.025,0.525) 14(1.525,0.525) 15(1.025,0.525) 16(0.525,0.525)
L3G4200DTR [mm]
  oval 0.4x0.3 smd: 1(0,0)
  rect 0.4x0.3 smd: 2(0,-0.65) 3(0,-1.3) 4(0,-1.95) 9(3.5,-1.95) 10(3.5,-1.3) 11(3.5,-0.65) 12(3.5,0)
  rect 0.3x0.4 smd: 5(0.775,-2.725) 6(1.425,-2.725) 7(2.075,-2.725) 8(2.725,-2.725) 13(2.725,0.775) 14(2.075,0.775) 15(1.425,0.775) 16(0.775,0.775)
  silkscreen extent -0.15,-2.88 3.65,0.92
MBRS540T3G [mil]
  rect 110x150 smd: A(140.49,0) K(-140.47,0)
  silkscreen extent -134,-118 134,118
"MIC5330-MFYML TR" [mm]
  rect 0.35x0.25 smd: 1(-0.825,0.75)
  oval 0.35x0.25 smd: 2(-0.825,0.25) 3(-0.825,-0.25) 4(-0.825,-0.75) 5(0.825,-0.75) 6(0.825,-0.25) 7(0.825,0.25) 8(0.825,0.75)
  oval 0.6x1.2 smd: 2(0,0)
"MIC49300-1.2WR SPACK-5" [mm]
  rect 0.8x0.7 smd: 1(0,3.4) 2(0,1.7) 3(0,0) 4(0,-1.7) 5(0,-3.4)
  rect 7.25x5 smd: 3(6.555,0)
  silkscreen extent -0.62,-4.75 10.5,4.75
"MicroSD Card Slot" [mm]
  rect 0.8x1.5 smd: 1(9.859,-9.35)
  oct 0.8x1.5 smd: 2(8.759,-9.35) 3(7.659,-9.35) 4(6.559,-9.35) 5(5.459,-9.35) 6(4.359,-9.35) 7(3.259,-9.35) 8(2.159,-9.35)
  oct 1.45x2 smd: SHLD(0,-3.65) SHLD(0,-11.95) SHLD(13.56,-11.95) SHLD(13.56,-3.65)
  silkscreen extent -0.51,-15 14.1,0
"Mini B USB Connector" [mm]
  rect 2x2.5 smd: 1(-1,7.7) 1(-1,2.3) 1(7.9,7.7) 1(7.9,2.3)
  rect 0.5x2.5 smd: 1(5.05,7.7) 2(4.25,7.7) 3(3.45,7.7) 4(2.65,7.7) 5(1.85,7.7)
  round 1 hole 1: NC(1.25,5.25) NC(5.56,5.25)
  silkscreen extent 0,0 6.86,9.27
MMA8452QT [mm]
  oval 0.567x0.3 smd: 1(-1.216,1)
  rect 0.567x0.3 smd: 2(-1.216,0.5) 3(-1.216,0) 4(-1.216,-0.5) 5(-1.216,-1) 9(1.216,-1) 10(1.216,-0.5) 11(1.216,0) 12(1.216,0.5) 13(1.216,1)
  rect 0.3x0.567 smd: 6(-0.5,-1.134) 7(0,-1.134) 8(0.5,-1.134) 14(0.5,1.134) 15(0,1.134) 16(-0.5,1.134)
MPL115A1 [mm]
  rect 1.05x0.55 smd: 1(-1.075,1.875)
  oval 1.05x0.55 smd: 2(-1.075,0.625) 3(-1.075,-0.625) 4(-1.075,-1.875) 5(1.075,-1.875) 6(1.075,-0.625) 7(1.075,0.625) 8(1.075,1.875)
  silkscreen extent -1.52,-2.5 1.52,2.5
"PC Wire Connector" [mm]
  oval 2x2.5 hole 1.1: L(-2.5,0) R(2.5,0)
  silkscreen extent -5,-5 5,4
"PLCC-4 LED" [mm]
  oct 1.2x1 smd: 1(-1.55,0.9) 2(1.55,0.9) 3(-1.55,-0.9) 4(1.55,-0.9)
  silkscreen extent -1.78,-1.4 1.75,1.4
RES12.2-8.5X3.3 [mm] "Resistor, Axial; Body 8.5 x 3.3 mm (LxDia. max), Lead Dia. 0.7 mm (max)"
  round 1.65 hole 1: 1(-6.1,0) 2(6.1,0)
  silkscreen extent -4.25,-1.65 4.25,1.65
"Resistor Array YC164" [mm]
  oct 1x0.65 smd: 1(-1,1.275) 4(-1,-1.275) 5(1,-1.275) 8(1,1.275)
  oct 1x0.5 smd: 2(-1,0.4) 3(-1,-0.4) 6(1,-0.4) 7(1,0.4)
  Top Layer keep-out lines w0.1: 0,1.524 0,-1.524
  Mechanical 1 keep-out lines w0.1: -1.905,1.905 1.905,1.905 1.905,-1.905 -1.905,-1.905 -1.905,1.905
  silkscreen extent -0.38,-1.65 0.38,1.65
"RHT03 Humidity Sensor" [mm]
  rect 1.6x1.6 hole 0.6: 1(3.8,-2.54)
  round 1.6 hole 0.6: 2(6.34,-2.54) 3(8.88,-2.54) 4(11.42,-2.54)
  silkscreen extent 0,-7.75 15.22,0
S25FL128P [mm]
  rect 0.5x0.4 smd: 1(-3.65,1.905)
  oval 0.5x0.4 smd: 2(-3.65,0.635) 3(-3.65,-0.635) 4(-3.65,-1.905) 5(3.65,-1.905) 6(3.65,-0.635) 7(3.65,0.635) 8(3.65,1.905)
  Top Layer region: -3.2,-2.4 3.2,-2.4 3.2,2.4 -3.2,2.4
  silkscreen extent -4.1,-3 4.1,3
"SG-636PCE 25.175MHz Crystal" [mm]
  rect 2.1x1.3 smd: 1(-2.3,2.54)
  oval 2.1x1.3 smd: 2(-2.3,-2.54) 3(2.3,-2.54) 4(2.3,2.54)
  silkscreen extent -2.63,-5.12 2.63,5.12
"SMD 0603" [mm]
  rect 0.9x0.8 smd: 1(-0.9,0) 2(0.9,0)
  Top Layer keep-out lines w0.1: 0,0.762 0,-0.762
  Mechanical 1 keep-out lines w0.1: 1.9,0.95 -1.9,0.95 -1.9,0 -1.9,-0.95 1.9,-0.95 1.9,0.95
  silkscreen extent -1.9,-0.95 1.9,0.95
"SMD 0805" [mm]
  rect 1.05x1.3 smd: 1(-1.175,0) 2(1.175,0)
  Top Layer keep-out lines w0.2: 0,1.143 0,-1.143
  Mechanical 1 keep-out lines w0.1: 2.4,1.35 2.4,-1.35 -2.4,-1.35 -2.4,0 -2.4,1.35 2.4,1.35
  silkscreen extent -2.4,-1.35 2.4,1.35
"SMD 1206" [mm]
  rect 1.25x1.7 smd: 1(-1.775,0) 2(1.775,0)
  Top Layer keep-out lines w0.2: -0.508,0 0.508,0 ; 0,1.397 0,-1.397
  Mechanical 1 keep-out lines w0.1: -3.15,1.6 -3.15,0 -3.15,-1.6 3.15,-1.6 3.15,1.6 -3.15,1.6
  silkscreen extent -3.15,-1.6 3.15,1.6
"SMD Tactile Switch" [mm]
  oct 1.8x1.1 smd: 1(0,0) 1(6.2,0) 2(0,-3.7) 2(6.2,-3.7)
  Mechanical 1 keep-out lines w0.1: 7.62,-4.953 -1.651,-4.953 -1.651,1.27 7.62,1.27 7.62,-4.953
  silkscreen extent 1.27,-3.18 5.08,-0.64
"TO-263 D2PACK" [mm]
  rect 2.3x1.19 smd: 1(0,2.413) 2(0,0) 3(0,-2.413)
  rect 7.696x6.502 smd: 2(10.338,0)
  silkscreen extent -1.5,-5.1 14.5,5.1
TQFP144_N [mm] "Thin QFP, 144-Leads, Body 20x20mm, Pitch 0.5mm, IPC Medium Density"
  oval 1.8x0.3 smd: 1(-10.55,8.75) 2(-10.55,8.25) 3(-10.55,7.75) 4(-10.55,7.25) 5(-10.55,6.75) 6(-10.55,6.25) 7(-10.55,5.75) 8(-10.55,5.25) 9(-10.55,4.75) 10(-10.55,4.25) 11(-10.55,3.75) 12(-10.55,3.25) 13(-10.55,2.75) 14(-10.55,2.25) 15(-10.55,1.75) 16(-10.55,1.25) 17(-10.55,0.75) 18(-10.55,0.25) 19(-10.55,-0.25) 20(-10.55,-0.75) 21(-10.55,-1.25) 22(-10.55,-1.75) 23(-10.55,-2.25) 24(-10.55,-2.75) 25(-10.55,-3.25) 26(-10.55,-3.75) 27(-10.55,-4.25) 28(-10.55,-4.75) 29(-10.55,-5.25) 30(-10.55,-5.75) 31(-10.55,-6.25) 32(-10.55,-6.75) 33(-10.55,-7.25) 34(-10.55,-7.75) 35(-10.55,-8.25) 36(-10.55,-8.75) 73(10.55,-8.75) 74(10.55,-8.25) 75(10.55,-7.75) 76(10.55,-7.25) 77(10.55,-6.75) 78(10.55,-6.25) 79(10.55,-5.75) 80(10.55,-5.25) 81(10.55,-4.75) 82(10.55,-4.25) 83(10.55,-3.75) 84(10.55,-3.25) 85(10.55,-2.75) 86(10.55,-2.25) 87(10.55,-1.75) 88(10.55,-1.25) 89(10.55,-0.75) 90(10.55,-0.25) 91(10.55,0.25) 92(10.55,0.75) 93(10.55,1.25) 94(10.55,1.75) 95(10.55,2.25) 96(10.55,2.75) 97(10.55,3.25) 98(10.55,3.75) 99(10.55,4.25) 100(10.55,4.75) 101(10.55,5.25) 102(10.55,5.75) 103(10.55,6.25) 104(10.55,6.75) 105(10.55,7.25) 106(10.55,7.75) 107(10.55,8.25) 108(10.55,8.75)
  oval 0.3x1.8 smd: 37(-8.75,-10.55) 38(-8.25,-10.55) 39(-7.75,-10.55) 40(-7.25,-10.55) 41(-6.75,-10.55) 42(-6.25,-10.55) 43(-5.75,-10.55) 44(-5.25,-10.55) 45(-4.75,-10.55) 46(-4.25,-10.55) 47(-3.75,-10.55) 48(-3.25,-10.55) 49(-2.75,-10.55) 50(-2.25,-10.55) 51(-1.75,-10.55) 52(-1.25,-10.55) 53(-0.75,-10.55) 54(-0.25,-10.55) 55(0.25,-10.55) 56(0.75,-10.55) 57(1.25,-10.55) 58(1.75,-10.55) 59(2.25,-10.55) 60(2.75,-10.55) 61(3.25,-10.55) 62(3.75,-10.55) 63(4.25,-10.55) 64(4.75,-10.55) 65(5.25,-10.55) 66(5.75,-10.55) 67(6.25,-10.55) 68(6.75,-10.55) 69(7.25,-10.55) 70(7.75,-10.55) 71(8.25,-10.55) 72(8.75,-10.55) 109(8.75,10.55) 110(8.25,10.55) 111(7.75,10.55) 112(7.25,10.55) 113(6.75,10.55) 114(6.25,10.55) 115(5.75,10.55) 116(5.25,10.55) 117(4.75,10.55) 118(4.25,10.55) 119(3.75,10.55) 120(3.25,10.55) 121(2.75,10.55) 122(2.25,10.55) 123(1.75,10.55) 124(1.25,10.55) 125(0.75,10.55) 126(0.25,10.55) 127(-0.25,10.55) 128(-0.75,10.55) 129(-1.25,10.55) 130(-1.75,10.55) 131(-2.25,10.55) 132(-2.75,10.55) 133(-3.25,10.55) 134(-3.75,10.55) 135(-4.25,10.55) 136(-4.75,10.55) 137(-5.25,10.55) 138(-5.75,10.55) 139(-6.25,10.55) 140(-6.75,10.55) 141(-7.25,10.55) 142(-7.75,10.55) 143(-8.25,10.55) 144(-8.75,10.55)
  silkscreen extent -10.67,-9.25 9.25,9.57, body extent -10,-10 10,10, height 1.6
TQFP-PF100_L [mm] "Thin QFP, 100-Leads, Body 14x14mm, Pitch 0.5mm, IPC High Density"
  oval 1.55x0.25 smd: 1(-7.525,6) 2(-7.525,5.5) 3(-7.525,5) 4(-7.525,4.5) 5(-7.525,4) 6(-7.525,3.5) 7(-7.525,3) 8(-7.525,2.5) 9(-7.525,2) 10(-7.525,1.5) 11(-7.525,1) 12(-7.525,0.5) 13(-7.525,0) 14(-7.525,-0.5) 15(-7.525,-1) 16(-7.525,-1.5) 17(-7.525,-2) 18(-7.525,-2.5) 19(-7.525,-3) 20(-7.525,-3.5) 21(-7.525,-4) 22(-7.525,-4.5) 23(-7.525,-5) 24(-7.525,-5.5) 25(-7.525,-6) 51(7.525,-6) 52(7.525,-5.5) 53(7.525,-5) 54(7.525,-4.5) 55(7.525,-4) 56(7.525,-3.5) 57(7.525,-3) 58(7.525,-2.5) 59(7.525,-2) 60(7.525,-1.5) 61(7.525,-1) 62(7.525,-0.5) 63(7.525,0) 64(7.525,0.5) 65(7.525,1) 66(7.525,1.5) 67(7.525,2) 68(7.525,2.5) 69(7.525,3) 70(7.525,3.5) 71(7.525,4) 72(7.525,4.5) 73(7.525,5) 74(7.525,5.5) 75(7.525,6)
  oval 0.25x1.55 smd: 26(-6,-7.525) 27(-5.5,-7.525) 28(-5,-7.525) 29(-4.5,-7.525) 30(-4,-7.525) 31(-3.5,-7.525) 32(-3,-7.525) 33(-2.5,-7.525) 34(-2,-7.525) 35(-1.5,-7.525) 36(-1,-7.525) 37(-0.5,-7.525) 38(0,-7.525) 39(0.5,-7.525) 40(1,-7.525) 41(1.5,-7.525) 42(2,-7.525) 43(2.5,-7.525) 44(3,-7.525) 45(3.5,-7.525) 46(4,-7.525) 47(4.5,-7.525) 48(5,-7.525) 49(5.5,-7.525) 50(6,-7.525) 76(6,7.525) 77(5.5,7.525) 78(5,7.525) 79(4.5,7.525) 80(4,7.525) 81(3.5,7.525) 82(3,7.525) 83(2.5,7.525) 84(2,7.525) 85(1.5,7.525) 86(1,7.525) 87(0.5,7.525) 88(0,7.525) 89(-0.5,7.525) 90(-1,7.525) 91(-1.5,7.525) 92(-2,7.525) 93(-2.5,7.525) 94(-3,7.525) 95(-3.5,7.525) 96(-4,7.525) 97(-4.5,7.525) 98(-5,7.525) 99(-5.5,7.525) 100(-6,7.525)
  silkscreen extent -7.65,-6.35 6.35,6.8, body extent -7,-7 7,7, height 1.2
"XBee Pro S1 Wireless Module" [mm]
  rect 1.2x1.2 hole 0.6: 1(-11,9)
  round 1.2 hole 0.6: 2(-11,7) 3(-11,5) 4(-11,3) 5(-11,1) 6(-11,-1) 7(-11,-3) 8(-11,-5) 9(-11,-7) 10(-11,-9) 11(11,-9) 12(11,-7) 13(11,-5) 14(11,-3) 15(11,-1) 16(11,1) 17(11,3) 18(11,5) 19(11,7) 20(11,9)
  silkscreen extent -12.19,-16 12.19,17
"XT9M20ANA8M - 8MHz Capacitor" [mm]
  rect 6x2 smd: 1(-4.5,0) 2(4.5,0)
  silkscreen extent -5.7,-2.35 5.7,2.35

## Part data
BB JEPC: "Header, 5-Pin, Dual row"
C1 C3 C11 C14 C16 C18 C20 C30 C39 C41 C42 C44 C45 C46 C47 C48 C69 C73 C77: library part SMD_Cap_Tantalum, "Tantalum Capacitor - Case A"
C2 C4 C5 C6 C7 C8 C9 C12 C13 C15 C17 C19 C21 C22 C23 C24 C25 C26 C27 C28 C29 C31 C32 C33 C34 C35 C38 C40 C43 C49 C56 C57 C58 C59 C60 C61 C62 C63 C64 C65 C66 C67 C68 C70 C71 C72 C74 C75 C76 C78 C79: library part Cap, "Capacitor"
C10 C36 C37: library part "Cap Pol1", "Polarized Capacitor (Radial)"
D1 D3: "40V 5A Scottky Diode"
D2: "3.3V 1.5W Zener Diode"
Debug1 Debug4: library part "Header 4", "Header, 4-Pin"
Debug2 Debug3 Debug5 Debug6: library part "Header 3", "Header, 3-Pin"
FPGA1: "Cyclone II Family, 1.2V FPGA, 85 I/O Pins, 2 PLLs, 144-Pin TQFP, Speed Grade 8, Commercial Grade, Pb-Free"
H1: "DC Power Jack"
Header2: "Header, 6-Pin"
Header3 Header4 Header5 Header6: library part "Header 3H", "Header, 3-Pin, Right Angle"
Header7: "Header, 20-Pin, Dual row, Right Angle"
Header9: library part "PC Wire Connector"
"Header 8": library part "Header 6", "Header, 6-Pin"
IC1: "Three-Axis Digital Output MEMS Gyroscope"
IC2: "3-Axis, 12-bit/8-bit Digital Accelerometer"
IC3 IC4: "128MB 104-MHz SPI Flash Memory"
IC5: "Miniature SPI Digital Barometer"
IC6: "3-Axis Digital Compass IC"
IC7: "High Performance 80 MHz MIPS-Based 32-Bit Flash Microcontroller with USB, CAN and Ethernet, 512KB Program Memory, 100-pin TQFP, Industrial Temperature"
IC8: "16MB FPGA CONFIGURATION DEVICE"
IC9: "EconOscillator Frequency Synthesizer"
J1 J2 J3 J4 J5 J6: "Jumper Wire"
LED1 LED2: library part HSMF-C157, "Surface Mount Chip LED"
LED3: library part "SMD LED", "Surface Mount Chip LED"
Module3: "MicroSD SPI Interface"
Module4: "XBee Pro S1 60mW Wireless Module"
Module5: "Digital Humidity & Temp Sensor"
Module6: library part "Mini USB Connector"
R1 R2 R3 R6 R7 R8 R9 R10 R11 R12 R14 R15 R16 R17 R18 R19 R20 R21 R28: library part Res2, "Resistor"
R4 R5 R13 R27 R29 R30: library part "SMD Resistor Array", "4-Count Resistor Array"
REG1: "Dual 300mA LDO (Lead Free Compliant)"
REG2 REG4: "3.0A LDO Fixed Volt.(ROHS Compliant)"
REG3: "Dual Supply, LV 3.0A LDO(ROHS Compliant)"
S1: "DIP Switch"
S2 S3 S4: library part SW-SPST, "Single-Pole, Single-Throw Switch"
X1: "8MHz SMD Crystal"
X2: "32.768KHz 7pF SMD Crystal"
X3: "OSCILLATOR 25.1750MHZ SMD"

## Free pads (board coordinates)
  round 5 hole 3: MOUNT(41,41) MOUNT(41,86) MOUNT(86,41) MOUNT(86,86)

## Nets (pads, with @x,y where several pads share a name; then routed paths per layer and width w, separated by ;. In a path a pad name is that pad's centre, name@x,y a point inside that pad or via, vN(x,y) a via of type N, cw(c..) or ccw(c..) an arc to the next point about the centre after c; other vN are vias at no path point)
25MHZ_CLOCK: FPGA1.17 X3.3
+1.2V: C46.1 C56.1 C60.1 C65.1 C70.1 C74.1 C76.1 C77.1 FPGA1.26 FPGA1.35 FPGA1.37 FPGA1.50 FPGA1.62 FPGA1.81 FPGA1.107 FPGA1.109 FPGA1.124 FPGA1.131 Header7.2 REG3.5
+1.5V: C44.1 Header7.4 REG1.7
+2.8V: C42.1 C57.1 C61.1 C66.1 C69.1 FPGA1.77 FPGA1.95 FPGA1.102 Header7.6 REG1.8
+3.3V: "Header 8.2" BB.4 C1.1 C2.2 C3.1 C4.1 C8.1 C12.1 C13.1 C14.1 C15.2 C17.1 C18.1 C19.2 C21.1 C23.2 C24.1 C25.1 C26.1 C27.1 C28.1 C29.1 C47.1 C58.1 C59.1 C62.1 C63.1 C64.1 C67.1 C68.1 C71.1 C72.1 C73.1 C75.1 FPGA1.5 FPGA1.23 FPGA1.29 FPGA1.46 FPGA1.54 FPGA1.66 FPGA1.116 FPGA1.127 FPGA1.138 Header1.1 Header1.2 Header2.1 Header7.8 IC1.1 IC1.15 IC1.16 IC2.1 IC2.14 IC3.7 IC3.8 IC4.7 IC4.8 IC5.1 IC6.2 IC6.4 IC6.13 IC7.2 IC7.16 IC7.37 IC7.46 IC7.55 IC7.62 IC7.86 IC8.3 IC8.7 IC8.8 J1.1 J2.1 J3.1 J4.1 JEPC.4 Module2.4 Module2.5 Module2.6 Module2.8 Module3.4 Module4.1 Module5.1 R1.2 R2.1 R8.1 R9.1 R10.2 R11.2 R12.2 R16.2 R17.2 R21.2 R27.5 R27.6 R27.7 R27.8 R28.1 REG4.3 S1.1 S1.2 S1.3 S1.4 S2.1 S3.1 S4.1 X3.1 X3.4
+5.0V: C9.2 C10.1 C11.1 C39.1 C41.1 C45.1 C48.1 C78.2 C79.2 Header7.10 IC9.3 J5.2 J6.2 Module1.1 R29.1 R29.2 REG1.1 REG1.4 REG1.5 REG2.3 REG3.1 REG3.2 REG3.4
ACCEL_INT1: FPGA1.55 Header2.5 IC2.11
ACCEL_INT2: FPGA1.57 Header2.4 IC2.9
ACCEL_SA0: FPGA1.53 IC2.7
ACCEL_SCL: FPGA1.43 Header2.3 IC2.4 R1.1
ACCEL_SDA: FPGA1.44 Header2.2 IC2.6 R2.2
ASDO: FPGA1.1 IC8.5 JEPC.9
BAROMETER_/CS: IC5.5 IC7.76
BAROMETER_/SHDN: IC5.4 IC7.38
BAROMETER_DIN: Debug1.2 IC4.5 IC5.7 IC7.72 Module3.3
BAROMETER_DOUT: Debug1.3 IC4.2 IC5.6 IC7.9 Module3.7
BAROMETER_SCLK: Debug1.4 IC4.6 IC5.8 IC7.70 Module3.5
BLED_BLUE1: FPGA1.69 Header7.34
BLED_BLUE2: FPGA1.70 Header7.36
BLED_BLUE3: FPGA1.71 Header7.38
BLED_BLUE4: FPGA1.72 Header7.40
BLED_ORANGE1: FPGA1.63 Header7.26
BLED_ORANGE2: FPGA1.64 Header7.28
BLED_ORANGE3: FPGA1.65 Header7.30
BLED_ORANGE4: FPGA1.67 Header7.32
BULTRASONIC_EDGE: FPGA1.60 Header7.16
BULTRASONIC_TRIGGER: FPGA1.59 Header7.14
CAMERA_DCLK: FPGA1.92 Header7.23
CAMERA_DOUT0: FPGA1.93 Header7.25
CAMERA_DOUT1: FPGA1.94 Header7.27
CAMERA_DOUT2: FPGA1.96 Header7.29
CAMERA_DOUT3: FPGA1.97 Header7.31
CAMERA_DOUT4: FPGA1.99 Header7.33
CAMERA_DOUT5: FPGA1.100 Header7.35
CAMERA_DOUT6: FPGA1.101 Header7.37
CAMERA_DOUT7: FPGA1.103 Header7.39
CAMERA_EXTCLK: FPGA1.79 Header7.17
CAMERA_HD: FPGA1.86 Header7.19
CAMERA_RESET: FPGA1.75 Header7.15
CAMERA_SCL: FPGA1.73 Header7.11
CAMERA_SDA: FPGA1.74 Header7.13
CAMERA_VD: FPGA1.87 Header7.21
CLOCK_SYNTH_0: FPGA1.21 IC9.2
CLOCK_SYNTH_1: FPGA1.91 IC9.1
CONF_DONE: FPGA1.83 JEPC.3 R28.2
CONFSWITCH_1: FPGA1.3 R4.4 S1.8
CONFSWITCH_2: FPGA1.4 R4.3 S1.7
CONFSWITCH_3: FPGA1.7 R4.2 S1.6
CONFSWITCH_4: FPGA1.8 R4.1 S1.5
CONFSWITCH_5: FPGA1.9 R5.3 S2.2
CONFSWITCH_6: FPGA1.24 R5.2 S3.2
CONFSWITCH_7: FPGA1.25 R5.1 S4.2
DATAO: FPGA1.14 IC8.2 JEPC.7
DCLK: FPGA1.15 IC8.6 JEPC.1
DS1085_SCL: Debug2.3 IC6.1 IC7.66 IC9.8 R11.1 R29.5
DS1085_SDA: Debug2.2 IC6.16 IC7.67 IC9.7 R12.1 R29.6
FPGA_A-/D: FPGA1.122 IC7.18
FPGA_D0: FPGA1.112 IC7.93
FPGA_D1: FPGA1.113 IC7.94
FPGA_D2: FPGA1.114 IC7.98
FPGA_D3: FPGA1.115 IC7.99
FPGA_D4: FPGA1.118 IC7.100
FPGA_D5: FPGA1.119 IC7.3
FPGA_D6: FPGA1.120 IC7.4
FPGA_D7: FPGA1.121 IC7.5
FPGA_OK-IN: FPGA1.129 IC7.88
FPGA_OK-OUT: FPGA1.126 IC7.87
FPGA_R-/W: FPGA1.125 IC7.19
FPGA_SPI_/GYROCS: FPGA1.45 Header1.19 IC1.5
FPGA_SPI_/SRAMCS: FPGA1.51 IC3.1
FPGA_SPI_CLOCK: FPGA1.40 Header1.20 IC1.2 IC3.6
FPGA_SPI_DATAIN: FPGA1.41 Header1.21 IC1.3 IC3.5
FPGA_SPI_DATAOUT: FPGA1.42 Header1.22 IC1.4 IC3.2
FPGASRAM_/WP: FPGA1.52 IC3.3
FULTRASONIC_EDGE: FPGA1.32 Module1.3
FULTRASONIC_TRIGGER: FPGA1.31 Module1.2
GND: "Header 8.3" BB.2 BB.10 C2.1 C3.2 C4.2 C5.1 C7.2 C8.2 C9.1 C10.2 C11.2 C12.2 C13.2 C14.2 C15.1 C16.2 C17.2 C18.2 C19.1 C20.2 C21.2 C23.1 C24.2 C25.2 C26.2 C27.2 C28.2 C29.2 C30.2 C31.2 C32.1 C33.1 C34.1 C35.1 C36.2 C37.2 C38.1 C39.2 C40.1 C41.2 C42.2 C43.2 C44.2 C45.2 C46.2 C47.2 C48.2 C49.1 C56.2 C57.2 C58.2 C59.2 C60.2 C61.2 C62.2 C63.2 C64.2 C65.2 C66.2 C67.2 C68.2 C69.2 C70.2 C71.2 C72.2 C73.2 C74.2 C75.2 C76.2 C77.2 C78.1 C79.1 D2.A Debug1.1 Debug2.1 Debug3.1 Debug4.1 Debug5.1 Debug6.1 FPGA1.6 FPGA1.19 FPGA1.27 FPGA1.33 FPGA1.34 FPGA1.36 FPGA1.38 FPGA1.39 FPGA1.49 FPGA1.56 FPGA1.61 FPGA1.68 FPGA1.78 FPGA1.80 FPGA1.98 FPGA1.105 FPGA1.106 FPGA1.108 FPGA1.110 FPGA1.111 FPGA1.117 FPGA1.123 FPGA1.128 FPGA1.130 FPGA1.140 H1.OUT Header1.13 Header2.6 Header3.3 Header4.3 Header5.3 Header6.3 Header7.1 Header7.3 Header7.5 Header7.7 Header7.9 Header9.R IC1.8 IC1.9 IC1.10 IC1.11 IC1.12 IC2.5 IC2.8 IC2.10 IC2.12 IC2.13 IC2.15 IC2.16 IC3.4 IC4.4 IC5.3 IC6.9 IC6.11 IC7.15 IC7.31 IC7.36 IC7.45 IC7.65 IC7.75 IC8.4 IC9.4 JEPC.2 JEPC.10 LED3.1 Module1.4 Module2.1 Module2.3 Module2.9 Module3.6 Module4.10 Module5.4 Module6.1 Module6.NC R3.2 R4.5 R4.6 R4.7 R4.8 R5.5 R5.6 R5.7 R6.2 R7.2 R13.5 R20.1 R29.3 R29.4 R30.5 R30.6 R30.7 R30.8 REG1.2 REG2.2 REG3.3 REG4.2 S5.1 X3.2
GPS_PPS: IC7.59 Module2.13
GPS_RXA: Debug6.3 IC7.39 Module2.15
GPS_RXB: Debug5.3 IC7.50 Module2.14
GPS_TXA: Debug6.2 IC7.40 Module2.17
GPS_TXB: Debug5.2 IC7.49 Module2.18
GPS_XRST: IC7.61 Module2.7 R8.2
GPS_XSTBY: IC7.60 Module2.10 R9.2
GYRO_DRDY: FPGA1.47 Header1.15 IC1.6
GYRO_INT1: FPGA1.48 Header1.23 IC1.7
HUMIDITY_I/O: IC7.29 Module5.2 R10.1
IC9_10K_C: IC9.5 J5.1 R29.7
IC9_10K_D: IC9.6 J6.1 R29.8
ICSP_MCLR: "Header 8.1" R18.2
ICSP_PGC: IC7.24 R15.2
ICSP_PGD: IC7.25 R14.2
MAGNET_DRDY: IC6.15 IC7.17
MCLR: IC7.13 R17.1 R18.1 S5.2
MOTOR_W1: FPGA1.141 Header3.1
MOTOR_W2: FPGA1.142 Header5.1
MOTOR_W3: FPGA1.143 Header6.1
MOTOR_W4: FPGA1.144 Header4.1
MSEL0: FPGA1.85 R30.1
MSEL1: FPGA1.84 R30.2
NCE: FPGA1.16 JEPC.6 R30.3
NCONFIG: FPGA1.20 JEPC.5 R27.1
NCSO: FPGA1.2 IC8.1 JEPC.8
NetC1_2: C1.2 IC1.13
NetC5_2: C5.2 IC2.2
NetC6_1: C6.1 C7.1 IC1.14
NetC6_2: C6.2 R3.1
NetC16_1: C16.1 IC5.2
NetC20_1: C20.1 IC6.10
NetC22_1: C22.1 IC6.12
NetC22_2: C22.2 IC6.8
NetC30_1: C30.1 IC7.85
NetC31_1: C31.1 IC7.30 R16.1
NetC40_2: C40.2 REG1.3
NetD1_0: D1.A Header9.L
NetD3_0: D3.A H1.IN
NetHeader3_2: Header3.2 J1.2
NetHeader4_2: Header4.2 J3.2
NetHeader5_2: Header5.2 J2.2
NetHeader6_2: Header6.2 J4.2
"NetHeader 8_4": "Header 8.4" R14.1
"NetHeader 8_5": "Header 8.5" R15.1
NetLED1_2: LED1.1 LED1.4 R6.1
NetLED2_2: LED2.1 LED2.4 R7.1
NetLED3_1: LED3.2 R21.1
NetModule6_4: Module6.5 R13.1 R13.2
NSTATUS: FPGA1.82 R27.2
OSC1: C32.2 IC7.63 X1.2
OSC2: C33.2 IC7.64 X1.1
P28: FPGA1.28 LED1.2 LED1.3
P30: FPGA1.30 LED2.2 LED2.3
P58: FPGA1.58
P104: FPGA1.104
P132: Debug4.4 FPGA1.132 IC7.10
P133: Debug4.2 FPGA1.133 IC7.12
P134: Debug4.3 FPGA1.134 IC7.11
P135: FPGA1.135 IC7.81
P136: FPGA1.136
P137: FPGA1.137
P139: FPGA1.139
PIC_SRAM_/CS: IC4.1 IC7.78
PIC_SRAM_/WP: IC4.3 IC7.58
PIC_UART1_/CTS: IC7.47 Module4.16
PIC_UART1_/RTS: IC7.48 Module4.12
PIC_UART1_RX: Debug3.2 IC7.52 Module4.2
PIC_UART1_TX: Debug3.3 IC7.53 Module4.3
SOSCI: C34.2 IC7.73 X2.1
SOSCO: C35.2 IC7.74 X2.2
SYS: C36.1 C37.1 C38.2 C43.1 C49.2 D1.K D3.K R19.2 REG2.1 REG4.1
SYSPOWMONITOR: D2.K IC7.23 R19.1 R20.2
TCK: BB.1 FPGA1.12 R30.4
TDI: BB.9 FPGA1.13 R27.4
TDO: BB.3 FPGA1.10
TMS: BB.5 FPGA1.11 R27.3
USB_PIC_N: IC7.56 Module6.4
USB_PIC_P: IC7.57 Module6.3
USD_/CS: IC7.77 Module3.2
VBUS: IC7.54 R13.6
XBEE_/DTR: IC7.92 Module4.9
XBEE_/RESET: IC7.28 Module4.5
XBEE_ASSOCIATE: IC7.91 Module4.15
pads on no net: "Header 8.6" BB.6 BB.7 BB.8 FPGA1.18 FPGA1.22 FPGA1.76 FPGA1.88 FPGA1.89 FPGA1.90 H1.NC Header1.3 Header1.4 Header1.5 Header1.6 Header1.7 Header1.8 Header1.9 Header1.10 Header1.11 Header1.12 Header1.14 Header1.16 Header1.17 Header1.18 Header1.24 Header7.12 Header7.18 Header7.20 Header7.22 Header7.24 IC2.3 IC6.3 IC6.5 IC6.6 IC6.7 IC6.14 IC7.1 IC7.6 IC7.7 IC7.8 IC7.14 IC7.20 IC7.21 IC7.22 IC7.26 IC7.27 IC7.32 IC7.33 IC7.34 IC7.35 IC7.41 IC7.42 IC7.43 IC7.44 IC7.51 IC7.68 IC7.69 IC7.71 IC7.79 IC7.80 IC7.82 IC7.83 IC7.84 IC7.89 IC7.90 IC7.95 IC7.96 IC7.97 LED3.3 LED3.4 Module1.NC Module2.2 Module2.11 Module2.12 Module2.16 Module2.19 Module2.20 Module3.1 Module3.8 Module3.SHLD Module4.4 Module4.6 Module4.7 Module4.8 Module4.11 Module4.13 Module4.14 Module4.17 Module4.18 Module4.19 Module4.20 Module5.3 Module6.2 R5.4 R5.8 R13.3 R13.4 R13.7 R13.8 REG1.6 X2.NC

## Polygon pours and split planes (outlines as drawn)
no net on Top Layer "Test" (solid, pour order 6): 118.041,36.576 118.041,87.376 123.121,87.376 123.121,36.576
no net on Top Layer "Test" (solid, pour order 10): 107.272,125.265 119.718,125.265 119.718,120.439 107.272,120.439
no net on Top Layer "Test" (solid, pour order 12): 107.272,119.423 119.718,119.423 119.718,114.597 107.272,114.597
GND on Ground Plane (split plane): 126.49,0.51 0.51,0.51 0.51,126.49 126.49,126.49
+3.3V on 3.3V Plane (split plane): 126.49,0.51 0.51,0.51 0.51,126.49 126.49,126.49

## Keep-outs
Top Layer:
  lines w0.254: 0.889,34.417 0.889,44.196 1.143,44.45 2.794,44.45 3.175,44.069 3.175,34.544 0.889,34.544 ; 2.159,5.969 2.159,30.353 3.048,31.242 4.318,31.242 4.953,30.607 4.953,5.715 2.413,5.715 2.159,5.969 ; 2.159,46.609 2.159,46.99 2.159,60.833 2.286,60.96 4.318,60.96 4.445,60.833 4.445,46.482 3.937,45.974 2.794,45.974 2.159,46.609 ; 3.302,96.266 3.302,98.933 13.716,98.933 13.716,96.266 3.302,96.266 ; 3.302,117.856 3.302,119.888 6.223,119.888 6.604,119.507 6.604,117.729 5.969,117.094 4.064,117.094 3.302,117.856 ; 3.302,122.555 3.302,124.587 3.683,124.968 6.604,124.968 6.731,124.841 6.731,122.174 3.683,122.174 3.302,122.555 ; 6.985,34.544 9.271,34.544 9.271,44.45 7.239,44.45 6.985,44.196 6.985,34.544 ; 7.112,110.236 7.747,109.601 9.144,109.601 10.033,110.49 10.033,111.506 8.89,112.649 7.112,112.649 7.112,110.236 ; 12.954,110.49 12.954,111.887 13.462,112.395 15.113,112.395 16.002,111.506 16.002,110.49 15.113,109.601 13.843,109.601 12.954,110.49 ; 13.081,34.417 15.367,34.417 15.367,41.783 15.24,41.91 13.208,41.91 13.081,41.783 13.081,34.417 ; 19.177,34.544 21.463,34.544 21.463,41.91 19.177,41.91 19.177,34.544 ; 22.733,116.459 22.733,118.364 22.86,118.491 26.543,118.491 26.797,118.237 26.797,116.459 22.733,116.459 ; 22.733,121.92 26.67,121.92 26.797,122.047 26.797,123.698 26.416,124.079 22.733,124.079 22.733,121.92 ; 24.638,5.207 24.638,30.734 25.019,31.115 27.432,31.115 27.432,5.08 24.765,5.08 24.638,5.207 ; 25.4,34.544 27.686,34.544 27.686,41.529 27.305,41.91 25.4,41.91 25.4,34.544 ; 29.337,8.001 29.718,7.62 31.75,7.62 31.75,26.924 31.496,27.178 31.242,27.432 29.337,27.432 29.337,8.001 ; 31.496,34.544 33.782,34.544 33.782,41.91 31.496,41.91 31.496,34.544 ; 45.339,105.283 45.339,107.442 45.593,107.696 55.372,107.696 55.499,107.569 55.499,105.537 54.991,105.029 45.593,105.029 45.339,105.283 ; 48.514,100.711 48.641,100.584 52.578,100.584 52.578,102.108 52.07,102.616 48.768,102.616 48.514,102.362 48.514,100.711 ; 51.435,7.493 51.435,27.686 53.594,27.686 53.594,7.493 51.435,7.493 ; 61.087,30.48 61.087,33.02 76.2,33.02 76.2,30.48 61.087,30.48 ; 64.262,2.159 72.009,2.159 72.009,4.445 64.262,4.445 64.262,2.159 ; 67.056,5.588 67.056,10.16 69.342,10.16 69.342,5.588 69.088,5.334 67.31,5.334 67.056,5.588 ; 75.692,2.159 75.692,4.318 75.819,4.445 83.185,4.445 83.312,4.318 83.312,2.54 82.931,2.159 75.692,2.159 ; 78.232,5.334 80.518,5.334 80.518,10.16 78.232,10.16 78.232,5.334 ; 83.947,46.101 86.233,46.101 86.233,50.927 83.947,50.927 83.947,46.101 ; 86.868,2.159 86.868,4.191 87.122,4.445 93.726,4.445 94.742,3.429 94.742,2.159 86.868,2.159 ; 87.376,46.101 89.535,46.101 89.662,46.228 89.662,50.8 89.535,50.927 87.503,50.927 87.376,50.8 87.376,46.101 ; 89.535,5.334 91.821,5.334 91.821,10.16 89.535,10.16 89.535,5.334 ; 93.741,123.233 93.741,124.884 94.376,125.519 103.52,125.519 103.774,125.265 103.774,123.487 103.52,123.233 93.741,123.233 ; 93.868,115.613 93.868,117.518 94.376,118.026 102.885,118.026 103.774,117.137 103.774,116.248 103.012,115.486 93.995,115.486 93.868,115.613 ; 97.917,2.159 97.917,4.445 105.664,4.445 105.664,2.159 97.917,2.159 ; 100.838,5.334 100.838,10.16 103.124,10.16 103.124,5.334 100.838,5.334 ; 108.585,1.778 109.474,0.889 110.109,0.889 111.125,1.905 111.125,31.115 108.585,31.115 108.585,1.778 ; 124.079,1.016 124.079,1.905 124.079,30.48 124.714,31.115 125.476,31.115 126.111,30.48 126.111,1.27 125.857,1.016 124.079,1.016
Keep-Out Layer:
  the board outline again, w0.3

## Silkscreen, mask and mechanical layers (free items; w line width, h text height)
Top Overlay:
  lines w0.254: 115.57,22.987 116.205,22.352 ; 116.84,22.987 116.205,22.352 ; 120.65,26.797 121.285,27.432 ; 120.65,28.067 121.285,27.432 ; 116.205,22.352 116.205,27.432 121.285,27.432
  text "+Y" at 119.888,29.718 h1.52 r180
  text "+X" at 114.046,26.543 h1.52 r270

## Text inside footprints (layer, text, board x,y; h text height)
BB: Top Overlay "1" at 120.734,124.63 h1.27 r180; Top Overlay "2" at 121.242,122.09 h1.27 r180
C10: Top Overlay "+" at 46.571,100.85 h1.5
C36: Top Overlay "+" at 20.783,116.783 h1.5
C37: Top Overlay "+" at 20.79,122.313 h1.5
Header7: Top Overlay "1" at 118.803,88.646 h1.27 r270; Top Overlay "2" at 121.343,88.773 h1.27 r270
JEPC: Top Overlay "1" at 120.831,118.818 h1.27 r180; Top Overlay "2" at 121.212,116.151 h1.27 r180